# Altium PCB Avalon_ctrlunit.PcbDoc (part 1 of 6)
Units mil, origin at the board's own origin, x right, y up, seen from the top; angles counter-clockwise.
Board outline 3947.62 x 3160.22 mil, 4 copper layers (Top Layer, Mid-Layer 1, Mid-Layer 2, Bottom Layer); 194 components, 260 nets, 936 pads, 465 vias.
Unrouted connection lines stored in the file: 1.
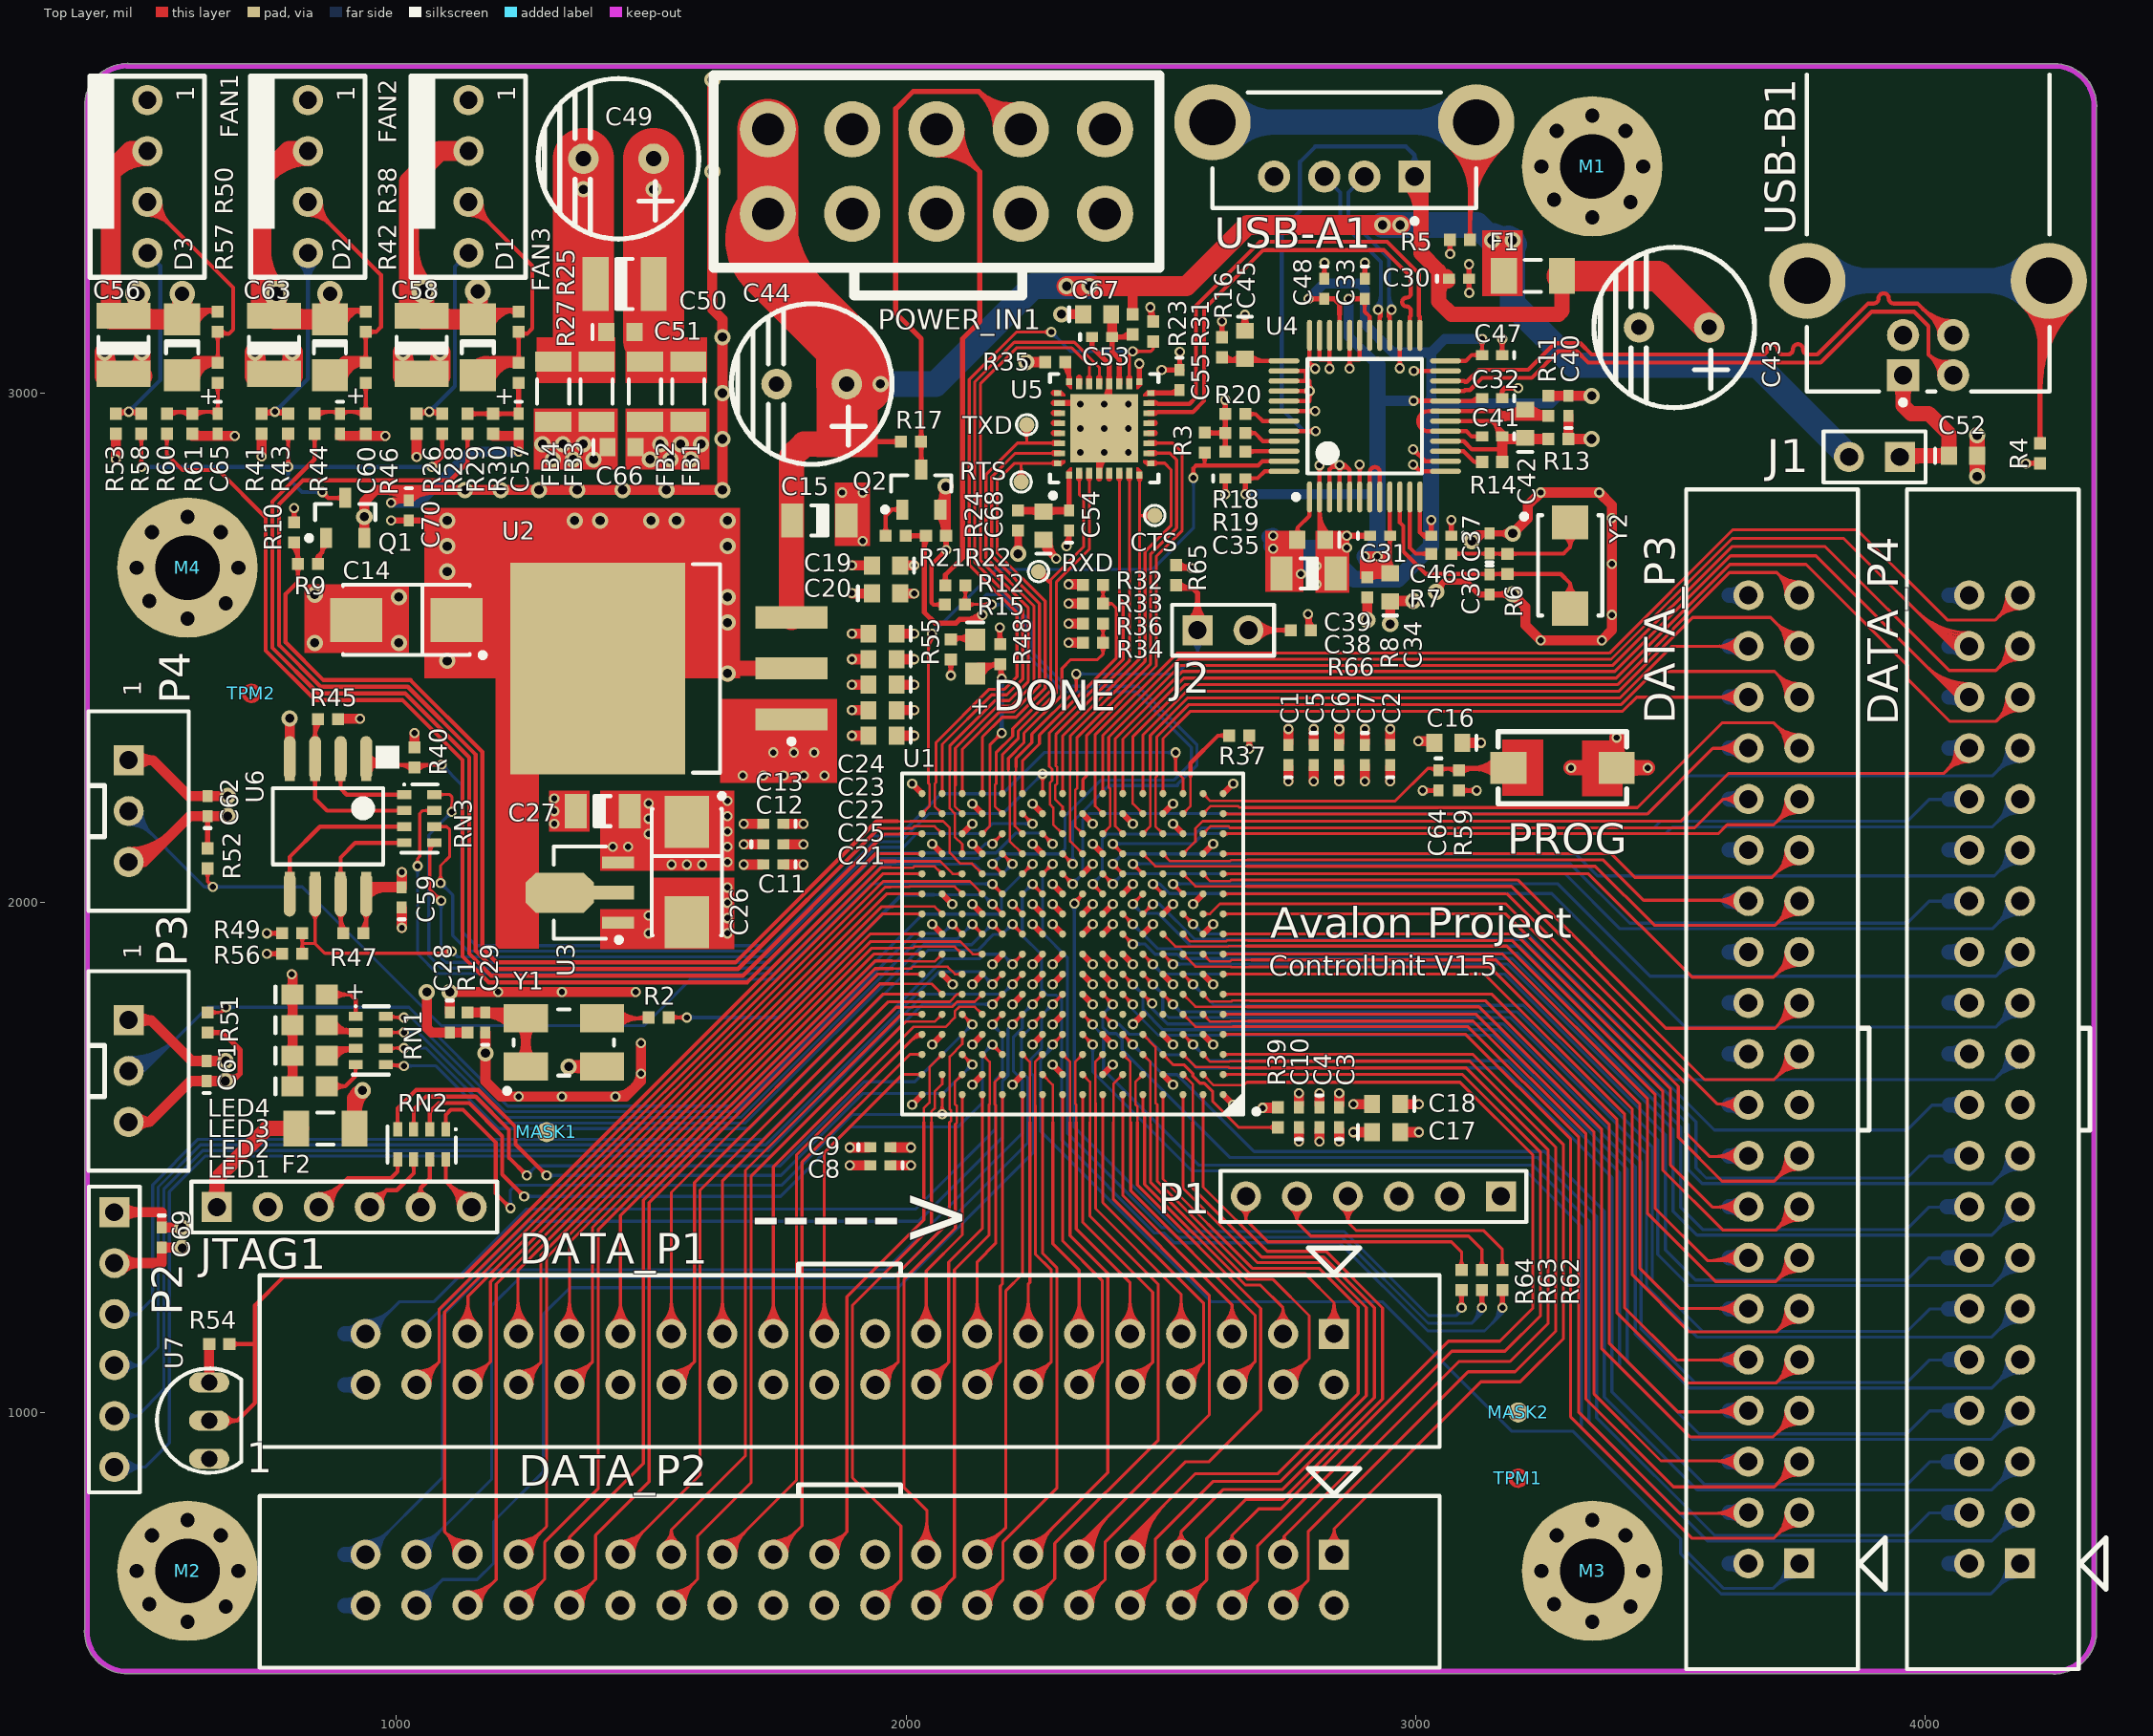
[diagram p0: Top Layer view]
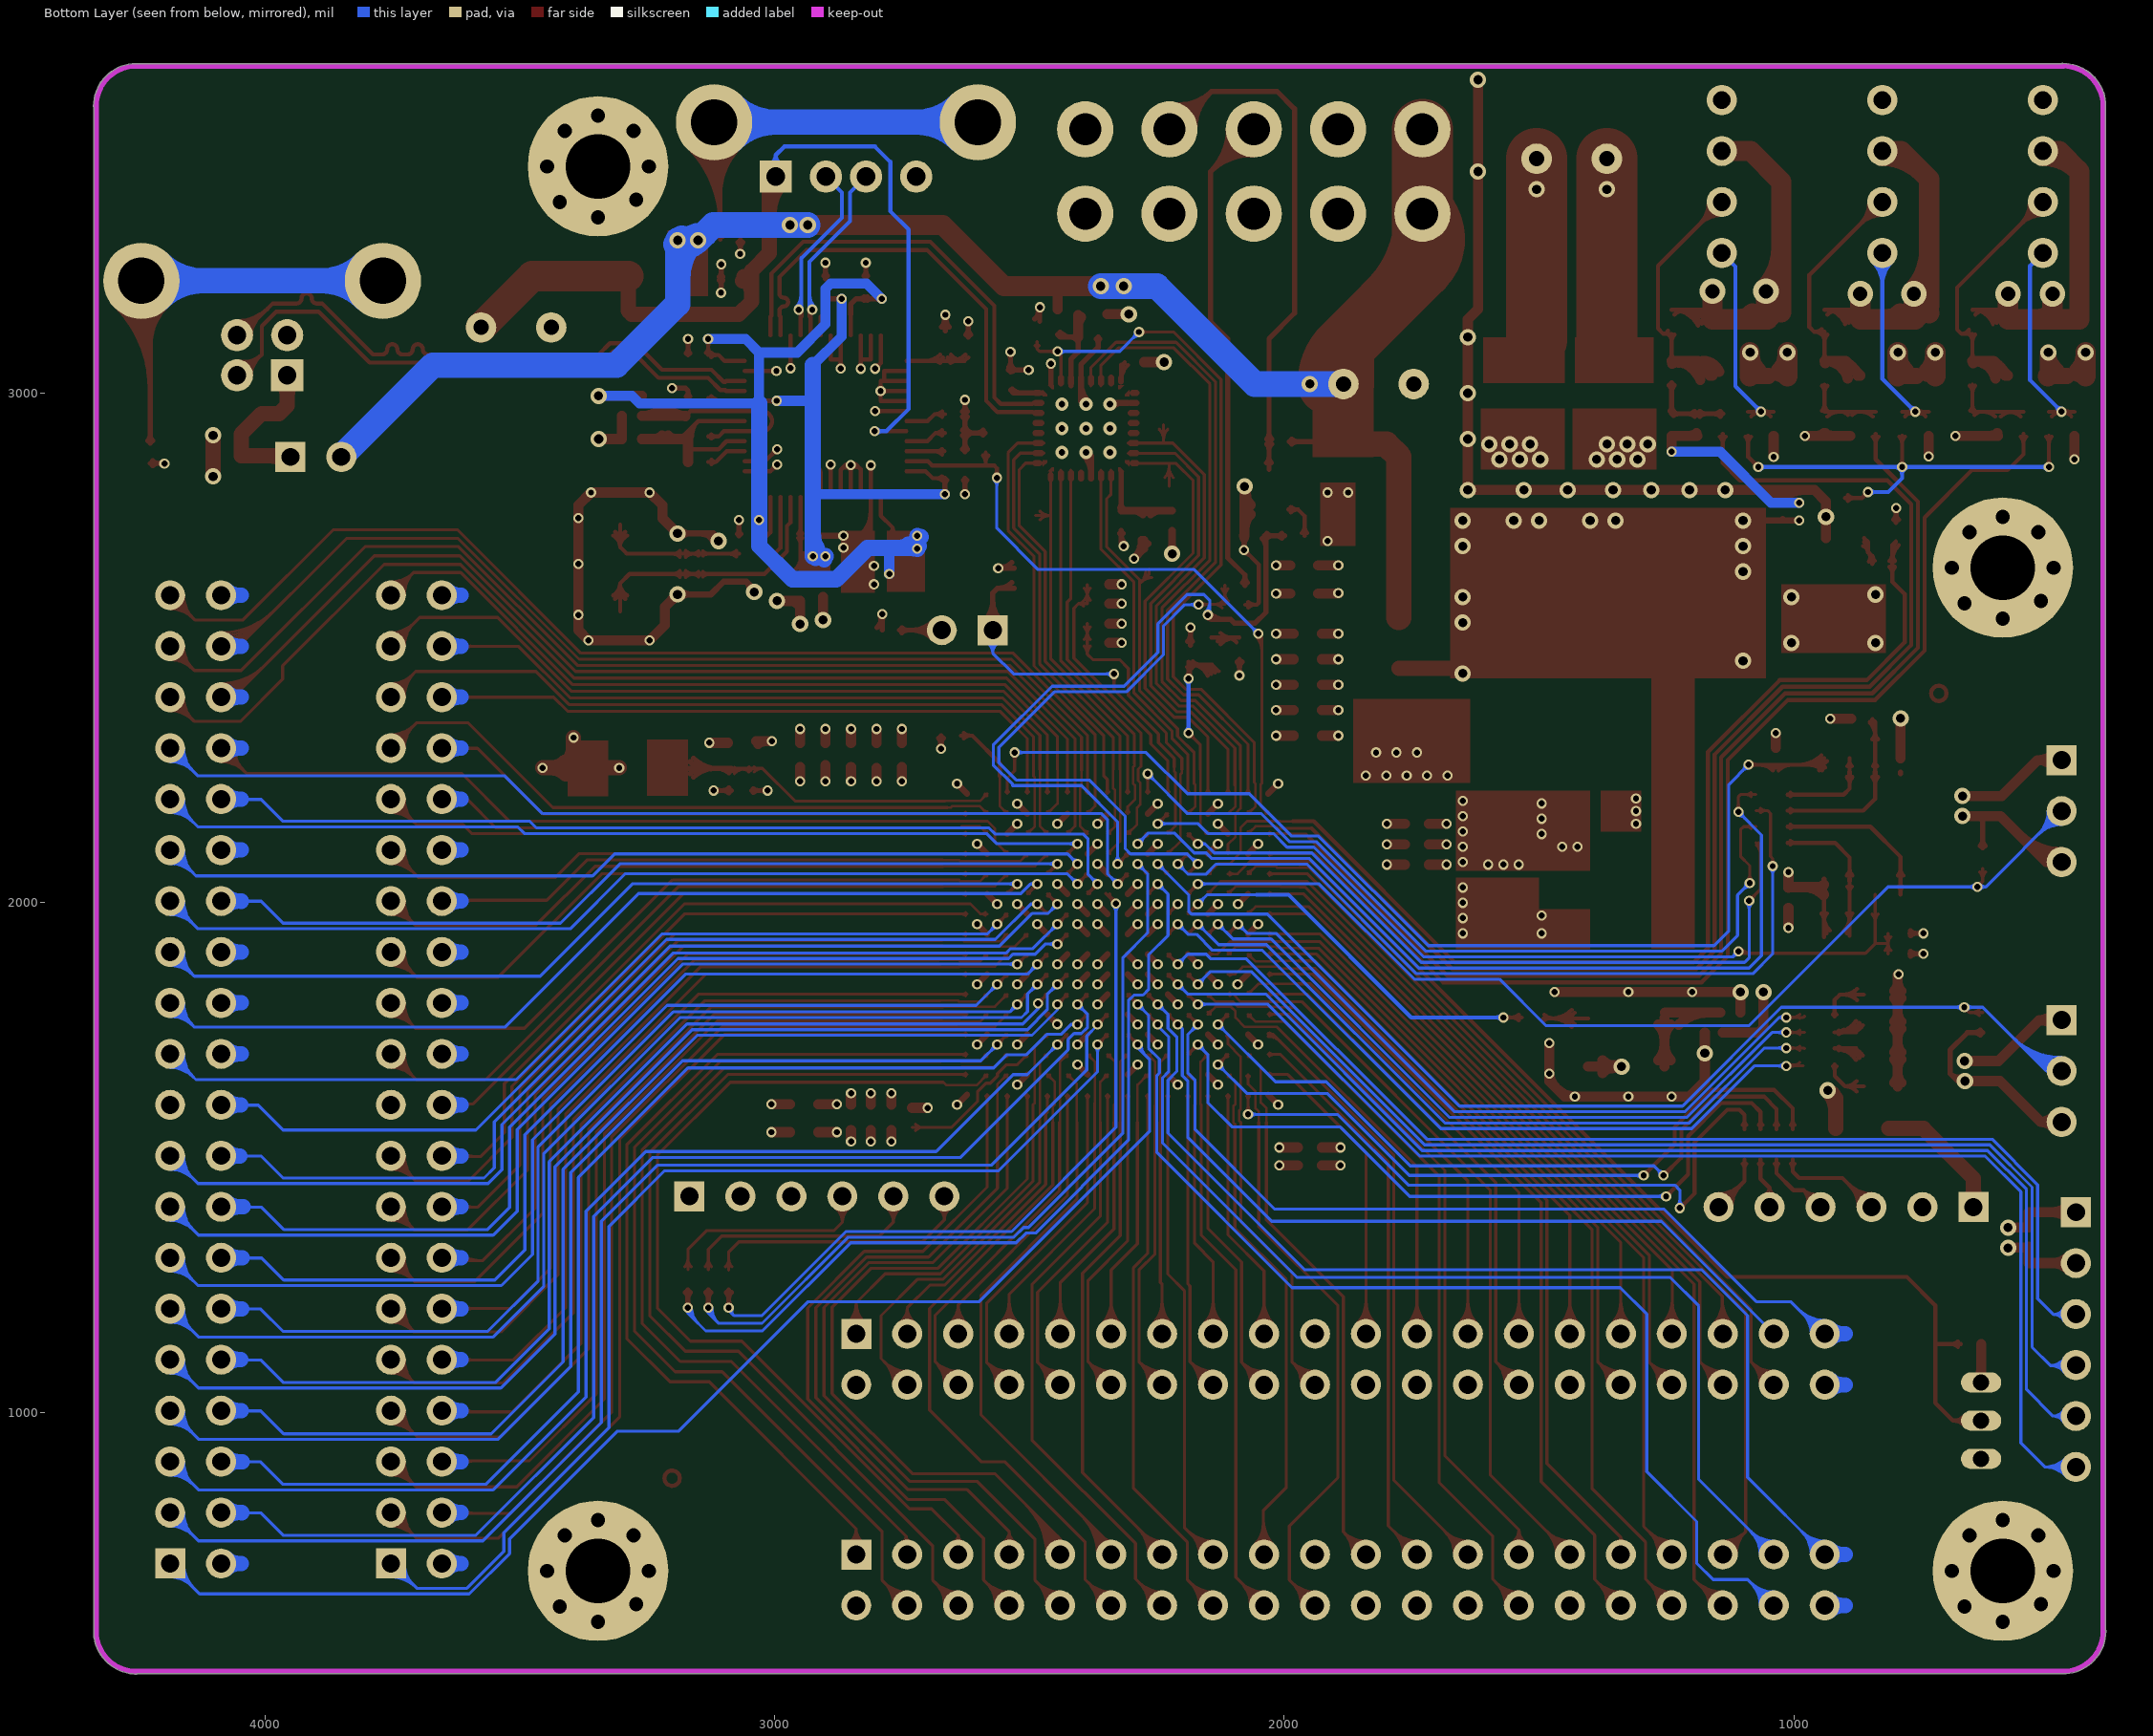
[diagram p1: Bottom Layer view, seen from below]
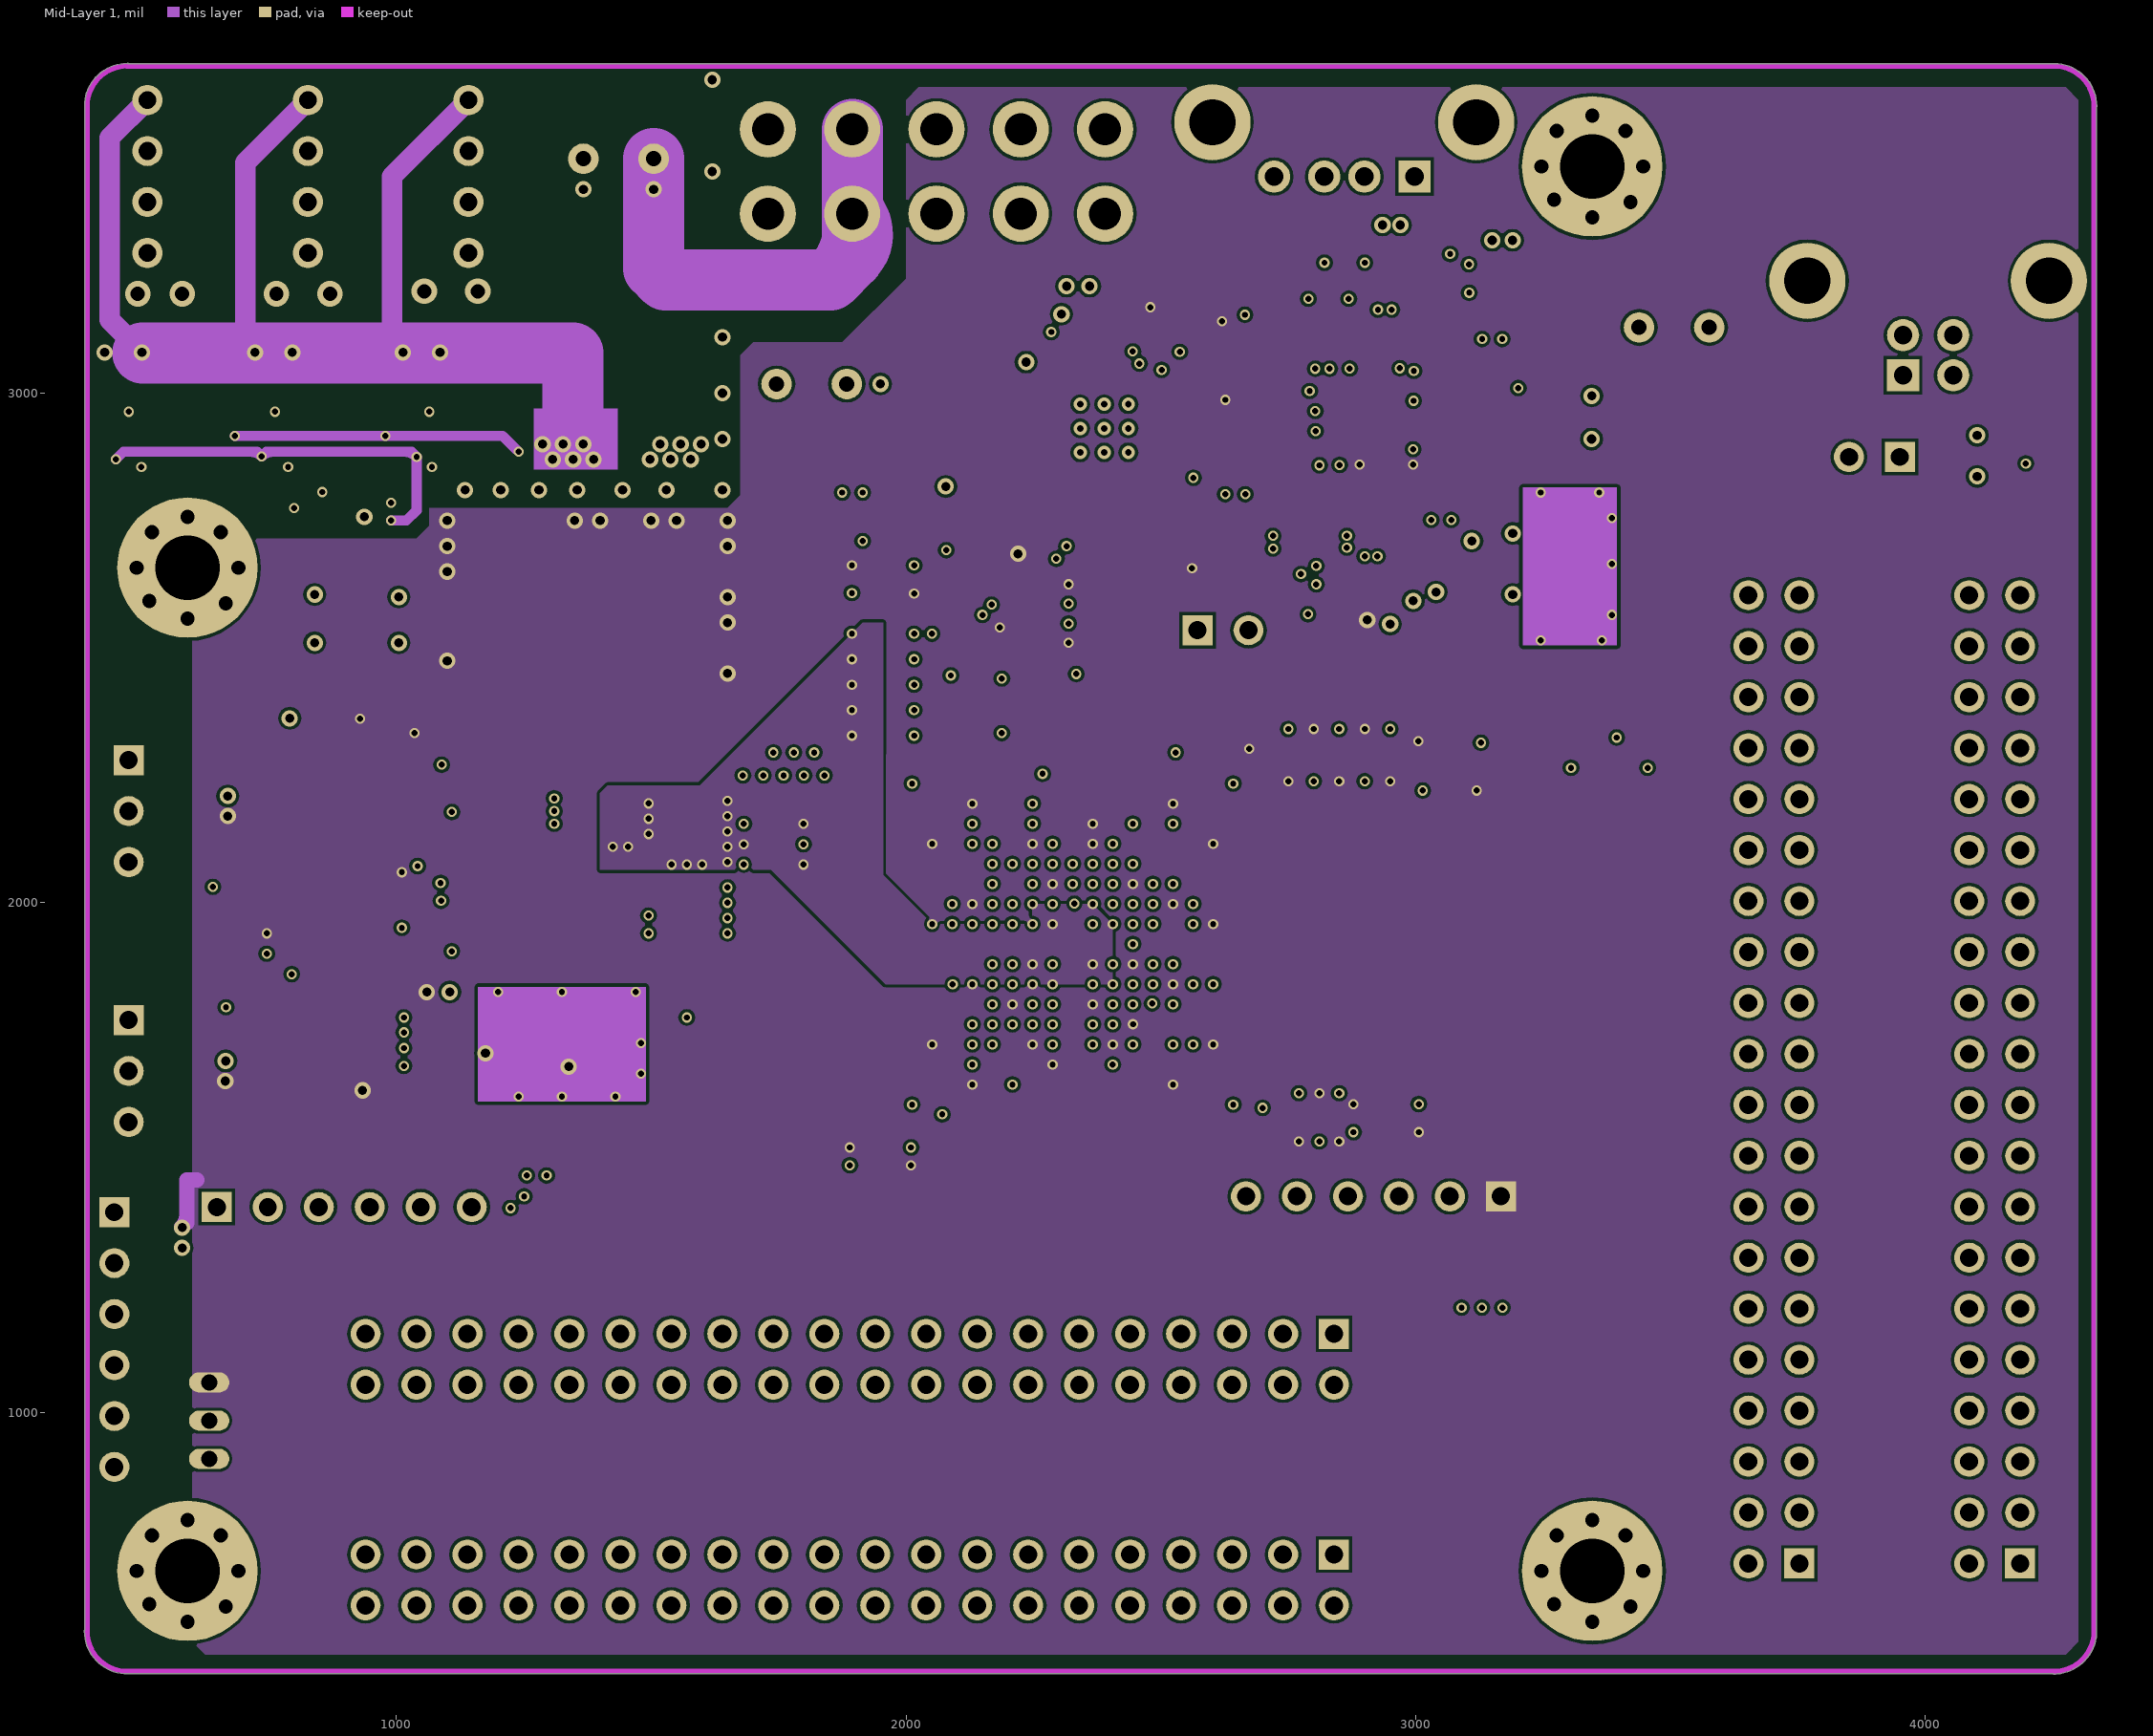
[diagram p2: Mid-Layer 1]
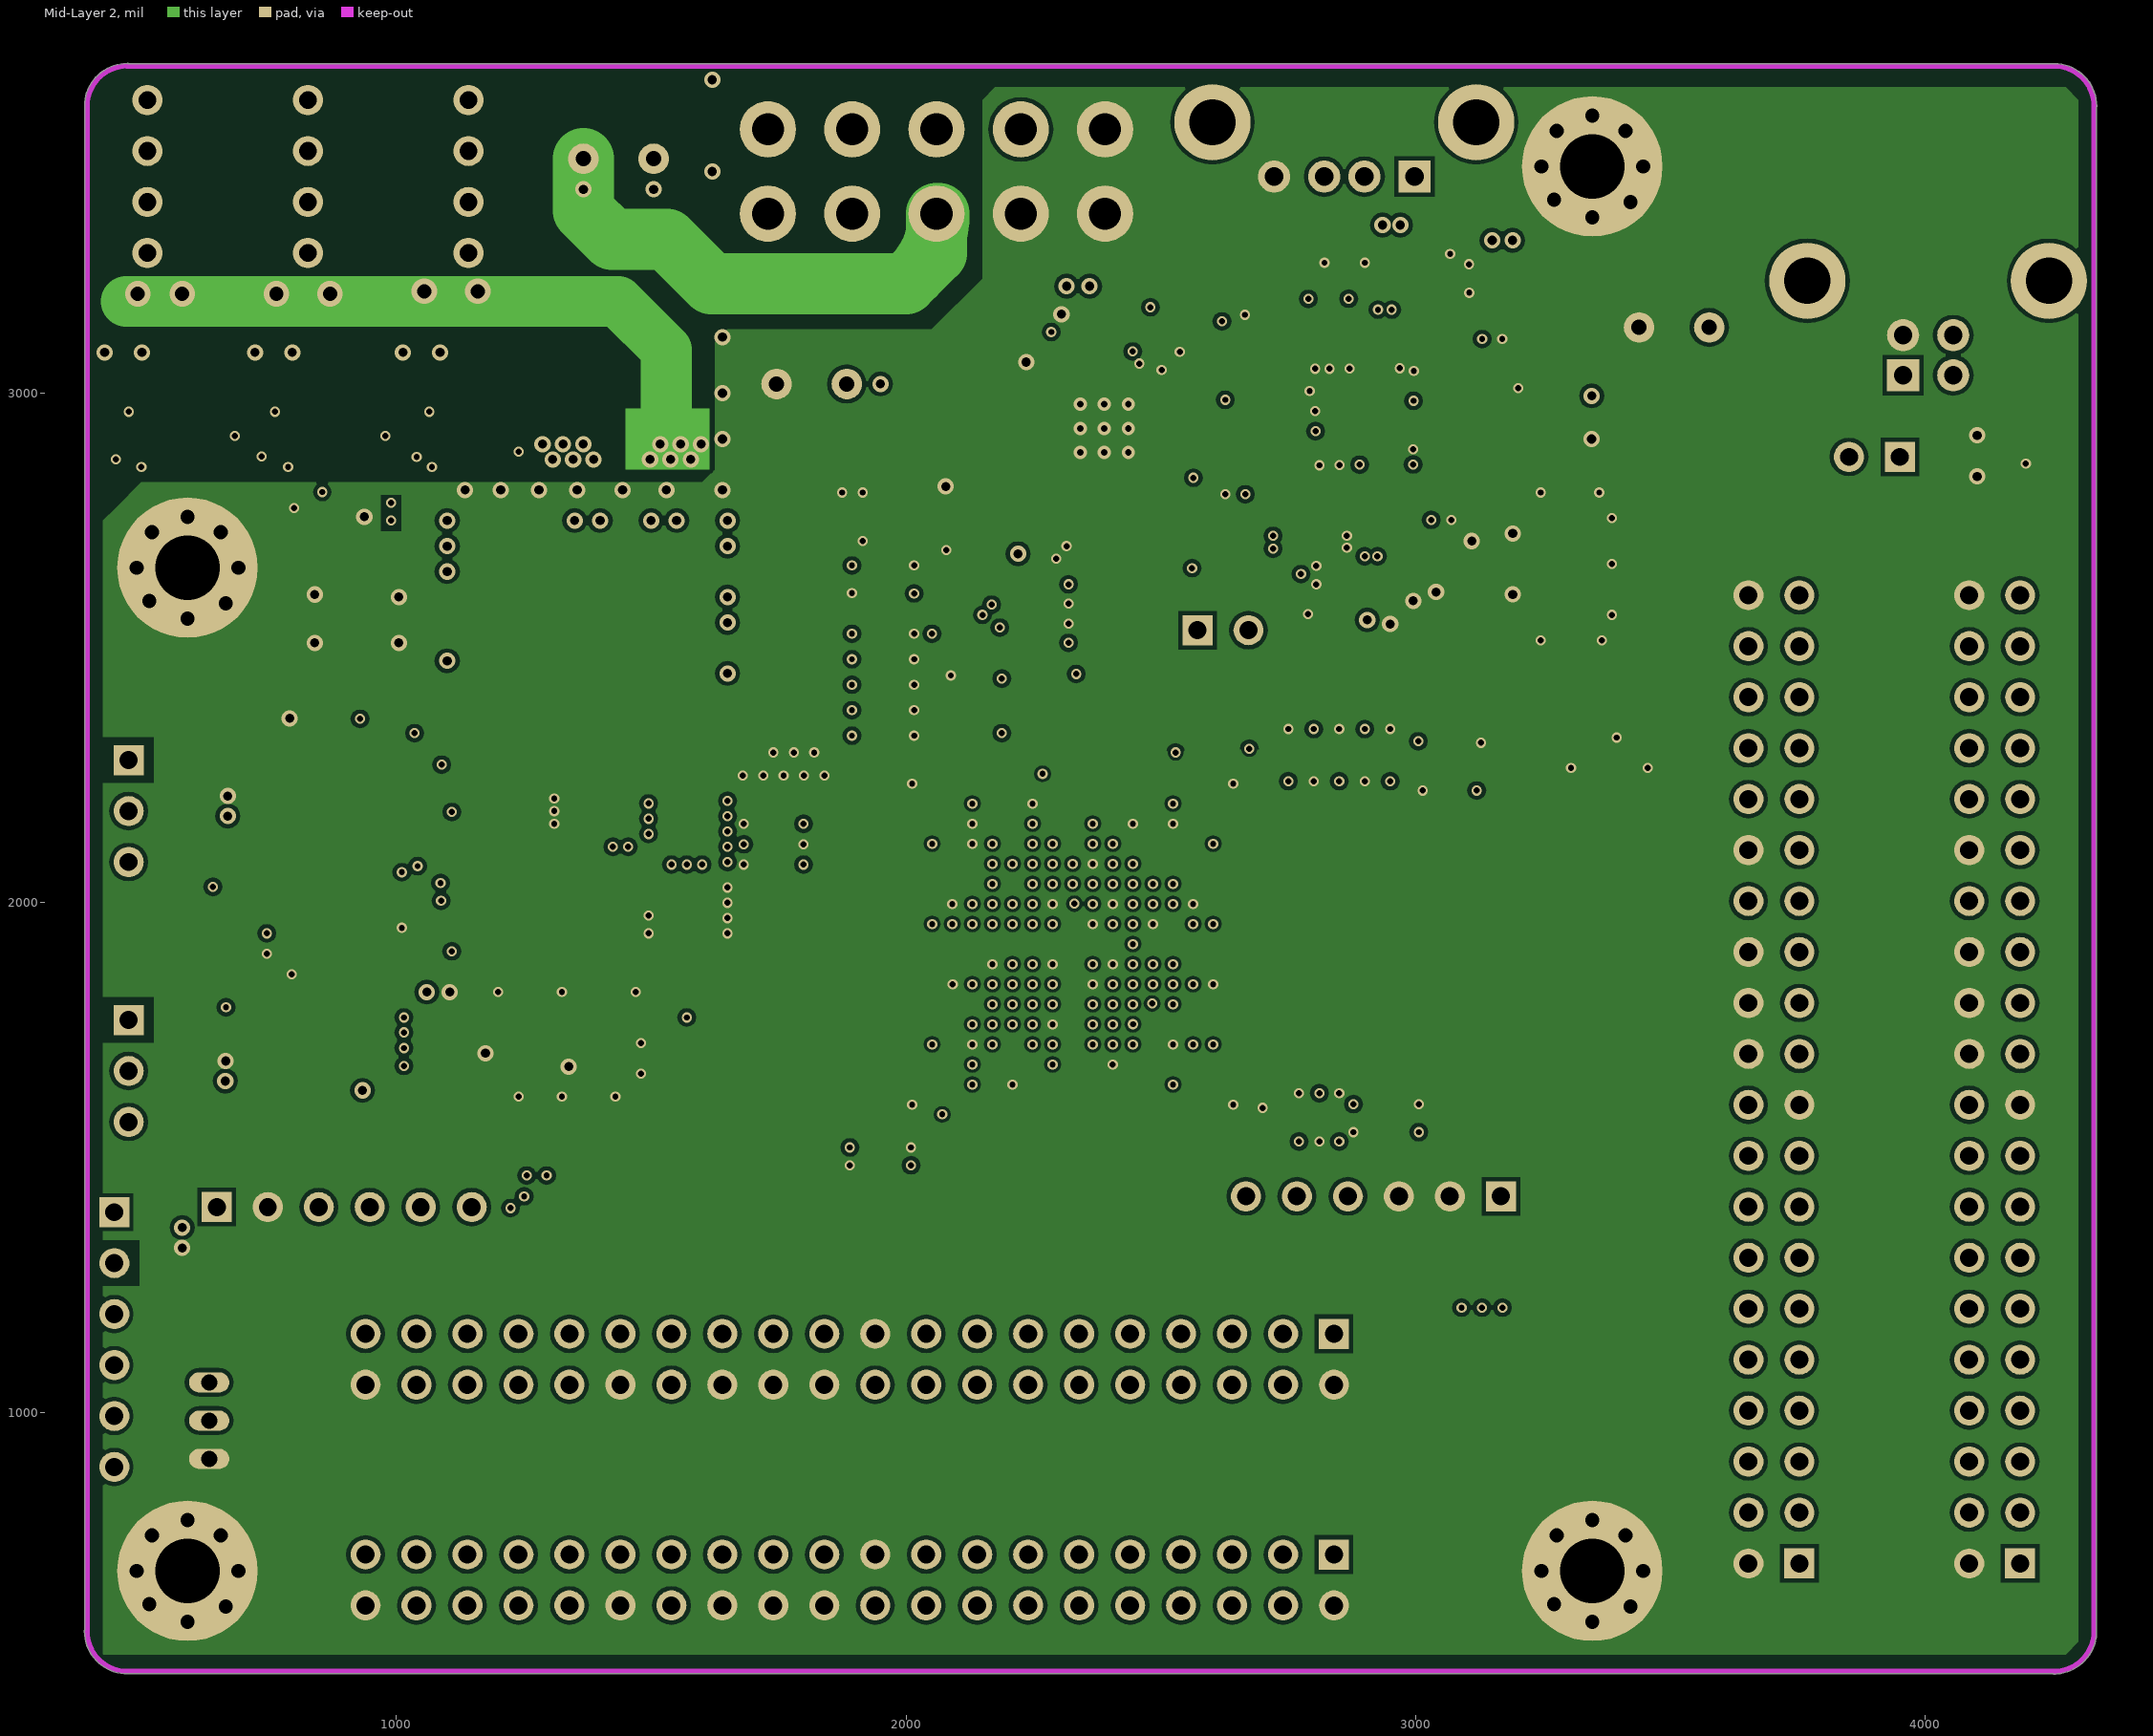
[diagram p3: Mid-Layer 2]

## Layer stack, top to bottom
Top Layer: signal copper 1.4
Dielectric: prepreg 12.6, FR-4, Dk 4.8
Mid-Layer 1: signal copper 1.4
Dielectric: core 12.6, FR-4, Dk 4.8
Mid-Layer 2: signal copper 1.4
Dielectric: prepreg 12.6, FR-4, Dk 4.8
Bottom Layer: signal copper 1.4

## Board outline
471,487.11 ccw(c472.15,570.86) 472.15,487.1 ccw(c472.15,492.12) 472.43,487.11 4250.29,487.11 ccw(c4251.98,491.83) 4251.98,486.82 ccw(c4251.98,570.57) 4258.96,487.11 4262.13,487.11 ccw(c4262.13,492.13) 4264.63,487.78 ccw(c4251.98,570.57) 4334.74,557.73 ccw(c4330.71,560.71) 4335.72,560.71 4335.72,569.42 ccw(c4251.98,570.57) 4335.73,570.57 ccw(c4330.72,570.57) 4335.72,570.86 4335.72,3561.32 ccw(c4331,3563) 4336.02,3563 ccw(c4252.26,3563) 4260.14,3646.38 ccw(c4258.27,3641.73) 4258.27,3646.75 4253.41,3646.75 ccw(c4252.26,3563) 4252.26,3646.76 ccw(c4252.26,3641.74) 4251.98,3646.75 474.12,3646.75 ccw(c472.43,3642.02) 472.43,3647.04 ccw(c472.43,3563.28) 388.68,3563.28 ccw(c393.69,3563.28) 388.69,3563 388.69,572.54 ccw(c393.41,570.86) 388.39,570.86 ccw(c472.15,570.86) 466.54,487.29 ccw(c467.87,492.13) 467.87,487.11

## Design rules (kind name [scope] priority, off if disabled: settings)
Clearance Clearance_8 [InNamedPolygon('GND1')] p1: gap=8
Clearance Clearance_7 [InNamedPolygon('GND2')] p2: gap=6
Clearance Clearance_6 [InNamedPolygon('VCC3V3')] p3: gap=8
Clearance Clearance_5 [InNamedPolygon('VCC3V31')] p4: gap=6
Clearance Clearance_4 [InNamedPolygon('VCC1V22')] p5: gap=6
Clearance Clearance_3 [OnLayer('Mid-Layer 1')] p6: gap=7
Clearance Clearance_2 [OnLayer('Mid-Layer 2')] p7: gap=7
Clearance Clearance_1 [OnLayer('Top Layer')] p8: gap=5
Clearance [OnLayer('Bottom Layer')] p9: gap=5
DiffPairsRouting DiffPair_D1DiffPairsRouting [InDifferentialPair ('D1')] p1: maxlimit=10 minlimit=8 mostfreqgap=8 maxuncoupledlength=500
DiffPairsRouting DiffPair_D2DiffPairsRouting [InDifferentialPair ('D2')] p2: maxlimit=10 minlimit=8 mostfreqgap=8 maxuncoupledlength=500
DiffPairsRouting DiffPair_USBDiffPairsRouting [InDifferentialPair ('USB')] p3: maxlimit=10 minlimit=8 mostfreqgap=8 maxuncoupledlength=500
DiffPairsRouting [All] p4: maxlimit=10 minlimit=10 mostfreqgap=10 maxuncoupledlength=500
HoleSize [All] p1: absolutevalues=TRUE maxlimit=99999 minlimit=1 maxpercent=80.000 minpercent=20.000
MatchedLengths DiffPair_D1MatchedLengths [InDifferentialPair ('D1')] p1: tolerance=10 checknetsindiffpair=TRUE checkdiffpairvsdiffpair=TRUE checkothers=TRUE
MatchedLengths DiffPair_D2MatchedLengths [InDifferentialPair ('D2')] p2: tolerance=10 checknetsindiffpair=TRUE checkdiffpairvsdiffpair=TRUE checkothers=TRUE
MatchedLengths DiffPair_USBMatchedLengths [InDifferentialPair ('USB')] p3: tolerance=10 checknetsindiffpair=TRUE checkdiffpairvsdiffpair=TRUE checkothers=TRUE
MinimumSolderMaskSliver [All] p1 off: minsoldermaskwidth=10
PlaneClearance [All] p1: clearance=12
PlaneConnect [All] p1: planeconnectstyle=Direct reliefexpansion=20 reliefentries=4 reliefconductorwidth=10 reliefairgap=10
PolygonConnect PolygonConnect_20 [All vs IsNamedPolygon('GND1')] p1: connectstyle=Direct reliefconductorwidth=10 reliefentries=4 polygonreliefangle="90 Angle" airgapwidth=10
PolygonConnect PolygonConnect_19 [All vs IsNamedPolygon('GND2')] p2: connectstyle=Direct reliefconductorwidth=10 reliefentries=4 polygonreliefangle="90 Angle" airgapwidth=10
PolygonConnect PolygonConnect_18 [All vs IsNamedPolygon('VCC3V31')] p3: connectstyle=Direct reliefconductorwidth=10 reliefentries=4 polygonreliefangle="90 Angle" airgapwidth=10
PolygonConnect PolygonConnect_17 [All vs IsNamedPolygon('VCC3V3')] p4: connectstyle=Direct reliefconductorwidth=10 reliefentries=4 polygonreliefangle="90 Angle" airgapwidth=10
PolygonConnect PolygonConnect_16 [All vs IsNamedPolygon('VCC1V22')] p5: connectstyle=Direct reliefconductorwidth=10 reliefentries=4 polygonreliefangle="90 Angle" airgapwidth=10
PolygonConnect PolygonConnect_15 [All vs IsNamedPolygon('VCC1V23')] p6: connectstyle=Direct reliefconductorwidth=10 reliefentries=4 polygonreliefangle="90 Angle" airgapwidth=10
PolygonConnect PolygonConnect_14 [All vs IsNamedPolygon('VCC1V2')] p7: connectstyle=Direct reliefconductorwidth=10 reliefentries=4 polygonreliefangle="90 Angle" airgapwidth=10
PolygonConnect PolygonConnect_13 [All vs IsNamedPolygon('VCC1V23')] p8: connectstyle=Direct reliefconductorwidth=10 reliefentries=4 polygonreliefangle="90 Angle" airgapwidth=10
PolygonConnect PolygonConnect_12 [All vs IsNamedPolygon('GND3')] p9: connectstyle=Direct reliefconductorwidth=10 reliefentries=4 polygonreliefangle="90 Angle" airgapwidth=10
PolygonConnect PolygonConnect_11 [All vs IsNamedPolygon('VCC3V3')] p10: connectstyle=Direct reliefconductorwidth=10 reliefentries=4 polygonreliefangle="90 Angle" airgapwidth=10
PolygonConnect PolygonConnect_10 [All vs IsNamedPolygon('VCC1V23')] p11: connectstyle=Direct reliefconductorwidth=10 reliefentries=4 polygonreliefangle="90 Angle" airgapwidth=10
PolygonConnect PolygonConnect_9 [All vs IsNamedPolygon('VCC1V23')] p12: connectstyle=Direct reliefconductorwidth=10 reliefentries=4 polygonreliefangle="90 Angle" airgapwidth=10
PolygonConnect PolygonConnect_8 [All vs IsNamedPolygon('VCC1V22')] p13: connectstyle=Direct reliefconductorwidth=10 reliefentries=4 polygonreliefangle="90 Angle" airgapwidth=10
PolygonConnect PolygonConnect_7 [All vs IsNamedPolygon('VCC1V2')] p14: connectstyle=Direct reliefconductorwidth=10 reliefentries=4 polygonreliefangle="90 Angle" airgapwidth=10
PolygonConnect PolygonConnect_6 [All vs IsNamedPolygon('VFAN12')] p15: connectstyle=Direct reliefconductorwidth=10 reliefentries=4 polygonreliefangle="90 Angle" airgapwidth=10
PolygonConnect PolygonConnect_5 [All vs IsNamedPolygon('VFAN12')] p16: connectstyle=Direct reliefconductorwidth=10 reliefentries=4 polygonreliefangle="90 Angle" airgapwidth=10
PolygonConnect PolygonConnect_4 [All vs IsNamedPolygon('VFAN12')] p17: connectstyle=Relief reliefconductorwidth=10 reliefentries=4 polygonreliefangle="90 Angle" airgapwidth=10
PolygonConnect PolygonConnect_3 [All vs IsNamedPolygon('VCC1V23')] p18: connectstyle=Direct reliefconductorwidth=10 reliefentries=4 polygonreliefangle="90 Angle" airgapwidth=10
PolygonConnect PolygonConnect_2 [All vs IsNamedPolygon('VCC1V22')] p19: connectstyle=Direct reliefconductorwidth=10 reliefentries=4 polygonreliefangle="90 Angle" airgapwidth=10
PolygonConnect PolygonConnect_1 [All vs IsNamedPolygon('VCC1V2')] p20: connectstyle=Direct reliefconductorwidth=10 reliefentries=4 polygonreliefangle="90 Angle" airgapwidth=10
PolygonConnect [All] p21: connectstyle=Direct reliefconductorwidth=10 reliefentries=4 polygonreliefangle="90 Angle" airgapwidth=10
RoutingVias [All] p1: holewidth=28 width=50 viastyle="Through Hole" minholewidth=12 minwidth=20 maxholewidth=2000 maxwidth=3000
SilkToSilkClearance [All] p1 off: silktosilkclearance=10
SilkscreenOverComponentPads [All] p1: minsilkscreentomaskgap=2
SolderMaskExpansion [All] p1: expansion=4
Width DiffPair_D1Width [InDifferentialPair('D1')] p1: maxlimit=1000 minlimit=8 preferedwidth=8 minimp=50.000000 maximp=50.000000 favimp=50.000000
Width DiffPair_D2Width [InDifferentialPair('D2')] p2: maxlimit=8 minlimit=8 preferedwidth=8
Width DiffPair_USBWidth [InDifferentialPair('USB')] p3: maxlimit=8 minlimit=8 preferedwidth=8
Width [All] p4: maxlimit=4111 minlimit=4 preferedwidth=10 midlayer1_minwidth=6 midlayer2_minwidth=6 minimp=50.000000 maximp=50.000000 favimp=50.000000
21 further rules are at their usual default settings.

## Classes and differential pairs
differential pair D2: +D2_P -D2_N
differential pair D1: +D1_P -D1_N
differential pair USB: +USB_P -USB_N

## Components (designator, comment, footprint, x,y, rotation, side; value= is the part's Value field where it differs from the comment)
C1 "0.47uF" CAPC1005L 2750,2290 r90 top
C2 "0.47uF" CAPC1005L 2950,2290 r90 top
C3 "0.47uF" CAPC1005L 2850,1579 r90 top
C4 "0.47uF" CAPC1005L 2811,1579 r270 top
C5 "0.47uF" CAPC1005L 2800,2290 r270 top
C6 "0.47uF" CAPC1005L 2850,2290 r90 top
C7 "0.47uF" CAPC1005L 2900,2290 r270 top
C8 "0.47uF" CAPC1005L 1950,1485 r180 top
C9 "0.47uF" CAPC1005L 1950,1520 r0 top
C10 "0.47uF" CAPC1005L 2771,1579 r90 top
C11 "0.47uF" CAPC1005L 1740,2075 r180 top
C12 "0.47uF" CAPC1005L 1740,2115 r0 top
C13 "0.47uF" CAPC1005L 1740,2155 r180 top
C14 "100uF/6.3V" C 1020,2555 r180 top
C15 "22uF" CAPC3216L 1830,2750 r180 top
C16 "4.7uF" CAPC1608L 3064,2314 r180 top
C17 "4.7uF" CAPC1608L 2942,1550 r0 top
C18 "4.7uF" CAPC1608L 2942,1605 r180 top
C19 "4.7uF" CAPC1608L 1961,2662 r180 top
C20 "4.7uF" CAPC1608L 1961,2607 r0 top
C21 "4.7uF" CAPC1608L 1954,2328 r180 top
C22 "4.7uF" CAPC1608L 1954,2428 r180 top
C23 "4.7uF" CAPC1608L 1954,2478 r180 top
C24 "4.7uF" CAPC1608L 1954,2528 r180 top
C25 "4.7uF" CAPC1608L 1954,2378 r180 top
C26 "100uF/6.3V" C 1570,2060 r270 top
C27 "22uF" CAPC3216L 1405,2180 r0 top
C28 "0.47uF" CAPC1005L 1105,1765 r270 top
C29 "0.47uF" CAPC1005L 1175,1765 r90 top
C30 "0.47uF" CAPC1005L 3085,3225 r0 top
C31 "0.47uF" CAPC1005L 2930,2720 r0 top
C32 "0.47uF" CAPC1005L 3150,2990 r180 top
C33 "0.47uF" CAPC1005L 2900,3205 r270 top
C34 "4.7uF" CAPC1608L 2950,2619 r90 top
C35 "0.47uF" CAPC1005L 2646,2833 r0 top
C36 "22pF" CAPC1005L 3145,2625 r270 top
C37 "22pF" CAPC1005L 3145,2705 r90 top
C38 "22uF" CAPC3216L 2790,2646 r180 top
C39 "4.7uF" CAPC1608L 2795,2712 r180 top
C40 "0.47uF" CAPC1005L 3300,2975 r90 top
C41 "0.47uF" CAPC1005L 3150,2915 r180 top
C42 "4.7uF" CAPC1608L 3215,2940 r90 top
C43 "470uF/6.3V" CAP8X8 3436,3129 r270 top
C44 "470uF/6.3V" CAP8X8 1744,3018 r270 top
C45 "4.7uF" CAPC1608L 2665,3095 r270 top
C46 "0.47uF" CAPC1005L 3050,2720 r180 top
C47 "0.47uF" CAPC1005L 3150,3075 r180 top
C48 "0.47uF" CAPC1005L 2821,3205 r270 top
C49 "270uF/16V" CAP8X8 1365,3460 r270 top
C50 "22uF" CAPC3225N 1448,3214 r0 top
C51 "4.7uF" CAPC1608L 1440,3120 r0 top
C52 "4.7uF" CAPC1608L 4074,2877 r0 top
C53 "0.47uF" CAPC1005L 2385,3110 r0 top
C54 "0.47uF" CAPC1005L 2320,2750 r90 top
C55 "0.47uF" CAPC1005L 2537,3026 r270 top
C56 "22uF" CAPC3225N 465,3095 r90 top
C57 "22pF" CAPC1005L 1240,2940 r270 top
C58 "22uF" CAPC3225N 1050,3095 r90 top
C59 "0.47uF" CAPC1005L 1011,2011 r90 top
C60 "22pF" CAPC1005L 890,2940 r270 top
C61 "0.47uF" CAPC1005L 628,1670 r90 top
C62 "0.47uF" CAPC1005L 630,2190 r90 top
C63 "22uF" CAPC3225N 760,3095 r90 top
C64 "0.47uF" CAPC1005L 3045,2240 r270 top
C65 "22pF" CAPC1005L 650,2940 r270 top
C66 "4.7uF" CAPC1608L 1442,2894 r0 top
C67 "4.7uF" CAPC1608L 2375,3155 r0 top
C68 "4.7uF" CAPC1608L 2270,2740 r90 top
C69 "0.47uF" CAPC1005L 540,1343 r270 top
C70 "0.47uF" CAPC1005L 1025,2770 r270 top
CTS "TP" TP 2488,2760 r90 top
D1 "Diode 1N4148" CD3216-1206 1160,3090 r90 top
D2 "Diode 1N4148" CD3216-1206 870,3090 r90 top
D3 "Diode 1N4148" CD3216-1206 580,3090 r90 top
DATA_P1 "Header 20X2" IDE40 1889.76,1102.36 r0 top locked
DATA_P2 "Header 20X2" IDE40 1889.76,669.29 r0 top
DATA_P3 "Header 20X2" IDE40 3700.79,1653.54 r270 top locked
DATA_P4 "Header 20X2" IDE40 4133.86,1653.54 r270 top locked
DONE "GREEN" CD1608-0603 2136,2483 r90 top
F1 "Fuse 2" RESC3216N 3230,3230 r0 top
F2 "Fuse 2" RESC3216N 861,1557 r0 top
FAN1 "Header 4" 4PINFAN 511.81,3425.2 r90 top locked
FAN2 "Header 4" 4PINFAN 826.77,3425.2 r90 top locked
FAN3 "Header 4" 4PINFAN 1141.73,3425.2 r90 top locked
FB1 "MB" INDC3216L 1573,3003 r90 top
FB2 "MB" INDC3216L 1488,3003 r90 top
FB3 "MB" INDC3216L 1393,3003 r90 top
FB4 "MB" INDC3216L 1308,3003 r90 top
J1 "Header 2" HDR1X2 3950,2875 r180 top
J2 "Header 2" HDR1X2 2572,2535 r0 top
JTAG1 "Header 6" HDR1X6 648,1403 r0 top
LED1 "GREEN" CD1608-0603 830,1640 r180 top
LED2 "GREEN" CD1608-0603 830,1700 r180 top
LED3 "GREEN" CD1608-0603 830,1760 r180 top
LED4 "GREEN" CD1608-0603 830,1820 r180 top
M1 "Mount Hole" MHOLE2 3346.46,3444.88 r0 top
M2 "Mount Hole" MHOLE2 590.55,688.98 r0 top
M3 "Mount Hole" MHOLE2 3346.46,688.98 r0 top
M4 "Mount Hole" MHOLE2 590.55,2657.48 r0 top
MASK1 "Socket" MASK_LT 1295,1550 r90 top
MASK2 "Socket" MASK_LT 3201,1000 r90 top
P1 "Header 6" HDR1X6 3167,1424 r180 top locked
P2 "Header 6" HDR1X6 447,1393 r270 top
P3 "TEMP2" 3PIN 475,1670 r270 top
P4 "TEMP3" 3PIN 475,2180 r270 top
POWER_IN1 "Header 5X2A" PWR_10PIN 2060,3435 r0 top
PROG "SW-PB" SKQMA 3288,2265 r180 top
Q1 "MMBT3904" SOT23_L 900,2755 r90 top
Q2 "MMBT3904" SOT23_L 2030,2811 r90 top
R1 "MB" RESC1005L 1140,1765 r270 top
R2 "0R" RESC1005L 1515,1775 r180 top
R3 "10K" RESC1005L 2586,2903 r270 top
R4 "MB" RESC1005L 4225,2882 r270 top
R5 "MB" RESC1005L 3087,3301 r180 top
R6 "1M" RESC1005L 3180,2665 r90 top
R7 "0R" RESC1005L 3050,2685 r0 top
R8 "MB" RESC1005L 2905,2619 r270 top
R9 "1K" RESC1005L 827,2665 r0 top
R10 "270R" RESC1005L 800,2727 r270 top
R11 "MB" RESC1005L 3260,2975 r90 top
R12 "4.7K" RESC1005L 2097,2623 r180 top
R13 "MB" RESC1005L 3280,2910 r0 top
R14 "2.43K" RESC1005L 3150,2865 r0 top
R15 "10K" RESC1005L 2096,2585 r180 top
R16 "10K" RESC1005L 2620,3090 r270 top
R17 "4.7K" RESC1005L 2010,2905 r180 top
R18 "510R" RESC1005L 2646,2922 r180 top
R19 "10K" RESC1005L 2646,2885 r180 top
R20 "510R" RESC1005L 2646,2959 r180 top
R21 "1K" RESC1005L 1980,2720 r180 top
R22 "270R" RESC1005L 2059,2720 r180 top
R23 "MB" RESC1005L 2445,3135 r270 top
R24 "MB" RESC1005L 2220,2750 r90 top
R25 "4.7K" RESC1005L 1240,3140 r270 top
R26 "4.7K" RESC1005L 1040,2940 r270 top
R27 "10K" RESC1005L 1240,3040 r270 top
R28 "100R" RESC1005L 1090,2940 r270 top
R29 "100R" RESC1005L 1140,2940 r90 top
R30 "4.7K" RESC1005L 1190,2940 r270 top
R31 "10K" RESC1005L 2485,3121 r90 top
R32 "4.7K" RESC1005L 2367,2624 r0 top
R33 "NC" RESC1005L 2367,2587 r0 top
R34 "NC" RESC1005L 2367,2510 r0 top
R35 "MB" RESC1005L 2293,3061 r0 top
R36 "100R" RESC1005L 2367,2548 r0 top
R37 "4.7K" RESC1005L 2654,2328 r180 top
R38 "4.7K" RESC1005L 940,3140 r270 top
R39 "4.7K" RESC1005L 2730,1579 r270 top
R40 "4.7K" RESC1005L 1036,2285 r270 top
R41 "4.7K" RESC1005L 736,2940 r270 top
R42 "10K" RESC1005L 940,3040 r270 top
R43 "100R" RESC1005L 788,2940 r270 top
R44 "100R" RESC1005L 840,2940 r90 top
R45 "1.8K" RESC1005L 866,2360 r180 top
R46 "4.7K" RESC1005L 940,2940 r270 top
R47 "1.8K" RESC1005L 916,1940 r180 top
R48 "510R" RESC1005L 2185,2488 r270 top
R49 "100R" RESC1005L 796,1940 r0 top
R50 "4.7K" RESC1005L 650,3140 r270 top
R51 "4.7K" RESC1005L 630,1765 r90 top
R52 "4.7K" RESC1005L 630,2087 r270 top
R53 "4.7K" RESC1005L 450,2940 r270 top
R54 "4.7K" RESC1005L 653,1134 r0 top
R55 "270R" RESC1005L 2088,2497 r270 top
R56 "100R" RESC1005L 796,1900 r180 top
R57 "10K" RESC1005L 650,3040 r270 top
R58 "100R" RESC1005L 500,2940 r270 top
R59 "4.7K" RESC1005L 3085,2240 r90 top
R60 "100R" RESC1005L 550,2940 r90 top
R61 "4.7K" RESC1005L 600,2940 r270 top
R62 "270R" RESC1005L 3170,1260 r270 top
R63 "270R" RESC1005L 3130,1260 r270 top
R64 "270R" RESC1005L 3090,1260 r270 top
R65 "4.7K" RESC1005L 2530,2643 r90 top
R66 "270R" RESC1005L 2775,2535 r0 top
RN1 "330R" EXBV8V 950,1730 r270 top
RN2 "100R" EXBV8V 1050,1526 r180 top
RN3 "100R" EXBV8V 1045.25,2165.25 r270 top
RTS "TP" TP 2226,2825.79 r90 top
RXD "TP" TP 2260,2650 r90 top
TPM1 "MASKTEST" MASKTEST 3201,871 r90 top
TPM2 "MASKTEST" MASKTEST 716,2411 r90 top
TXD "TP" TP 2237,2938 r90 top
U1 "XC6SLX16-2FTG256C" FTG256_L 2327,1919 r180 top locked
U2 "LM1086CS-3.3" TS3B_M 1535,2460 r180 top
U3 "RT9166A_CXL" SOT-89_M 1360,2020 r180 top
U4 "μPD720114" TQFP48_L 2900,2955 r90 top
U5 "FT232RQ-Tray" PQFN5X5-32_V_M 2389,2931.02 r0 top locked
U6 "W25Q80BV" WSOP8 866,2150 r180 top
U7 "DS18B20" TO-92_M 633,984 r0 top
USB-A1 "1364428-1" 1364428 2860,3590 r90 top locked
USB-B1 "1470156-1" 1470156 4005.38,3626.05 r90 top locked
Y1 "2SMX" SMX2 1330,1725 r0 top
Y2 "XTAL" 4SMX 3303,2662 r270 top

## Footprints (in the part's own frame and the unit in brackets; to place one, negate y for a bottom-side part, rotate by r counter-clockwise, add the part's x,y. Pads: shape width x height; smd on the part's side, far side on the other; paste and mask are expansions set on the pad)
3PIN [mm]
  rect 1.5x1.5 hole 0.9: 1(-2.54,0)
  round 1.5 hole 0.9: 2(0,0) 3(2.54,0)
  silkscreen extent -4.97,-2 4.97,3
4PINFAN [mm]
  round 1.5 hole 0.9 paste+0.05 mask+0.05: 1(3.81,0) 2(1.27,0) 3(-1.27,0) 4(-3.81,0)
  silkscreen extent -5.03,-2.85 5,2.85
4SMX [mm] "Quartz Crystal, SM; Body 5.2 x 3.4 mm (LxW max)"
  rect 1.7x1.8 smd: 1(-2.15,0) 2(2.15,0)
  silkscreen extent -2.57,-2.42 2.5,1.6
1364428 [mm] "Connector; USB1.1, Type A, Thru-Hole; 4 Position; Vertical"
  rect 1.6x1.6 hole 0.92: 1(-4.19,-3.5)
  round 1.6 hole 0.92: 2(-4.19,-1) 3(-4.19,1) 4(-4.19,3.5)
  round 3.8 hole 2.3: 5(-1.48,6.57) 6(-1.48,-6.57)
  silkscreen extent -6.53,-6.57 0,6.57
1470156 [mm] "Connector; USB1.1, Type B, Thru-Hole; 4 Position; Right Angle"
  rect 1.6x1.6 hole 0.92: 1(-15.01,1.25)
  round 1.6 hole 0.92: 2(-15.01,-1.25) 3(-13.01,-1.25) 4(-13.01,1.25)
  round 3.8 hole 2.3: 5(-10.3,6.02) 6(-10.3,-6.02)
  silkscreen extent -16.48,-6.05 -0.02,6.05
C [mm] "Capacitor, SM Tantalum; Body 6.0 x 3.2 mm (LxW typ)"
  rect 2.6x2.2 smd: 1(-2.5,0) 2(2.5,0)
  silkscreen extent -3.93,-1.75 3.15,1.87
CAP8X8 [mil]
  round 60 hole 30: 1(0,140) 2(0,2.2)
  silkscreen extent -157,-86 157,229
CAPC1005L [mm] "Chip Capacitor, Body 1.0x0.5mm, IPC High Density"
  rect 0.6x0.5 smd: 1(-0.5,0) 2(0.5,0)
  silkscreen extent -1.1,-0.15 -1.1,0.15, body extent -0.55,-0.3 0.55,0.3, height 0.6
CAPC1608L [mm] "Chip Capacitor, Body 1.6x0.8mm, IPC High Density"
  rect 0.8x0.9 smd: 1(-0.7,0) 2(0.7,0)
  silkscreen extent -1.4,-0.35 -1.4,0.35, body extent -0.87,-0.48 0.87,0.48, height 0.85
CAPC3216L [mm] "Chip Capacitor, Body 3.2x1.6mm, IPC High Density"
  rect 1.1x1.7 smd: 1(-1.35,0) 2(1.35,0)
  silkscreen extent -0.4,-0.75 0.4,0.75, body extent -1.7,-0.9 1.7,0.9, height 1.35
CAPC3225N [mm] "Chip Capacitor, Body 3.2x2.5mm, IPC Medium Density"
  rect 1.3x2.7 smd: 1(-1.45,0) 2(1.45,0)
  silkscreen extent -0.4,-1.25 0.4,1.25, body extent -1.7,-1.35 1.7,1.35, height 1.35
CD1608-0603 [mm] "Chip Diode; Body 1.6 x 0.8 mm (LxW typ)"
  rect 1.1x1 smd: 1(-0.85,0) 2(0.85,0)
  silkscreen extent 1.7,-0.4 1.7,0.4
CD3216-1206 [mm] "Chip Diode; Body 3.2 x 1.6 mm (LxW typ)"
  rect 1.6x1.8 smd: 1(-1.4,0) 2(1.4,0)
  silkscreen extent -0.3,-0.8 0.3,0.8
EXBV8V [mm] "Chip Resistor Array, (0603x4); SM; 8 Leads; Body 3.40 x 1.80 mm (LxW max)"
  rect 0.45x0.7 smd: 1(-1.2,-0.75) 2(-0.4,-0.75) 3(0.4,-0.75) 4(1.2,-0.75) 5(1.2,0.75) 6(0.4,0.75) 7(-0.4,0.75) 8(-1.2,0.75)
  silkscreen extent -1.75,-0.9 1.7,0.9
FTG256_L [mil] "BGA, 256-Leads, Body 17x17mm, Pitch 1mm"
  round 14 smd mask+1.97: A1(-295.28,295.28) A2(-255.91,295.28) A3(-216.54,295.28) A4(-177.17,295.28) A5(-137.8,295.28) A6(-98.43,295.28) A7(-59.06,295.28) A8(-19.68,295.28) A9(19.68,295.28) A10(59.06,295.28) A11(98.43,295.28) A12(137.8,295.28) A13(177.17,295.28) A14(216.54,295.28) A15(255.91,295.28) A16(295.28,295.28) B1(-295.28,255.91) B2(-255.91,255.91) B3(-216.54,255.91) B4(-177.17,255.91) B5(-137.8,255.91) B6(-98.43,255.91) B7(-59.06,255.91) B8(-19.68,255.91) B9(19.68,255.91) B10(59.06,255.91) B11(98.43,255.91) B12(137.8,255.91) B13(177.17,255.91) B14(216.54,255.91) B15(255.91,255.91) B16(295.28,255.91) C1(-295.28,216.54) C2(-255.91,216.54) C3(-216.54,216.54) C4(-177.17,216.54) C5(-137.8,216.54) C6(-98.43,216.54) C7(-59.06,216.54) C8(-19.68,216.54) C9(19.68,216.54) C10(59.06,216.54) C11(98.43,216.54) C12(137.8,216.54) C13(177.17,216.54) C14(216.54,216.54) C15(255.91,216.54) C16(295.28,216.54) D1(-295.28,177.17) D2(-255.91,177.17) D3(-216.54,177.17) D4(-177.17,177.17) D5(-137.8,177.17) D6(-98.43,177.17) D7(-59.06,177.17) D8(-19.68,177.17) D9(19.68,177.17) D10(59.06,177.17) D11(98.43,177.17) D12(137.8,177.17) D13(177.17,177.17) D14(216.54,177.17) D15(255.91,177.17) D16(295.28,177.17) E1(-295.28,137.8) E2(-255.91,137.8) E3(-216.54,137.8) E4(-177.17,137.8) E5(-137.8,137.8) E6(-98.43,137.8) E7(-59.06,137.8) E8(-19.68,137.8) E9(19.68,137.8) E10(59.06,137.8) E11(98.43,137.8) E12(137.8,137.8) E13(177.17,137.8) E14(216.54,137.8) E15(255.91,137.8) E16(295.28,137.8) F1(-295.28,98.43) F2(-255.91,98.43) F3(-216.54,98.43) F4(-177.17,98.43) F5(-137.8,98.43) F6(-98.43,98.43) F7(-59.06,98.43) F8(-19.68,98.43) F9(19.68,98.43) F10(59.06,98.43) F11(98.43,98.43) F12(137.8,98.43) F13(177.17,98.43) F14(216.54,98.43) F15(255.91,98.43) F16(295.28,98.43) G1(-295.28,59.06) G2(-255.91,59.06) G3(-216.54,59.06) G4(-177.17,59.06) G5(-137.8,59.06) G6(-98.43,59.06) G7(-59.06,59.06) G8(-19.68,59.06) G9(19.68,59.06) G10(59.06,59.06) G11(98.43,59.06) G12(137.8,59.06) G13(177.17,59.06) G14(216.54,59.06) G15(255.91,59.06) G16(295.28,59.06) H1(-295.28,19.68) H2(-255.91,19.68) H3(-216.54,19.68) H4(-177.17,19.68) H5(-137.8,19.68) H6(-98.43,19.68) H7(-59.06,19.68) H8(-19.68,19.68) H9(19.68,19.68) H10(59.06,19.68) H11(98.43,19.68) H12(137.8,19.68) H13(177.17,19.68) H14(216.54,19.68) H15(255.91,19.68) H16(295.28,19.68) J1(-295.28,-19.68) J2(-255.91,-19.68) J3(-216.54,-19.68) J4(-177.17,-19.68) J5(-137.8,-19.68) J6(-98.43,-19.68) J7(-59.06,-19.68) J8(-19.68,-19.68) J9(19.68,-19.68) J10(59.06,-19.68) J11(98.43,-19.68) J12(137.8,-19.68) J13(177.17,-19.68) J14(216.54,-19.68) J15(255.91,-19.68) J16(295.28,-19.68) K1(-295.28,-59.06) K2(-255.91,-59.06) K3(-216.54,-59.06) K4(-177.17,-59.06) K5(-137.8,-59.06) K6(-98.43,-59.06) K7(-59.06,-59.06) K8(-19.68,-59.06) K9(19.68,-59.06) K10(59.06,-59.06) K11(98.43,-59.06) K12(137.8,-59.06) K13(177.17,-59.06) K14(216.54,-59.06) K15(255.91,-59.06) K16(295.28,-59.06) L1(-295.28,-98.43) L2(-255.91,-98.43) L3(-216.54,-98.43) L4(-177.17,-98.43) L5(-137.8,-98.43) L6(-98.43,-98.43) L7(-59.06,-98.43) L8(-19.68,-98.43) L9(19.68,-98.43) L10(59.06,-98.43) L11(98.43,-98.43) L12(137.8,-98.43) L13(177.17,-98.43) L14(216.54,-98.43) L15(255.91,-98.43) L16(295.28,-98.43) M1(-295.28,-137.8) M2(-255.91,-137.8) M3(-216.54,-137.8) M4(-177.17,-137.8) M5(-137.8,-137.8) M6(-98.43,-137.8) M7(-59.06,-137.8) M8(-19.68,-137.8) M9(19.68,-137.8) M10(59.06,-137.8) M11(98.43,-137.8) M12(137.8,-137.8) M13(177.17,-137.8) M14(216.54,-137.8) M15(255.91,-137.8) M16(295.28,-137.8) N1(-295.28,-177.17) N2(-255.91,-177.17) N3(-216.54,-177.17) N4(-177.17,-177.17) N5(-137.8,-177.17) N6(-98.43,-177.17) N7(-59.06,-177.17) N8(-19.68,-177.17) N9(19.68,-177.17) N10(59.06,-177.17) N11(98.43,-177.17) N12(137.8,-177.17) N13(177.17,-177.17) N14(216.54,-177.17) N15(255.91,-177.17) N16(295.28,-177.17) P1(-295.28,-216.54) P2(-255.91,-216.54) P3(-216.54,-216.54) P4(-177.17,-216.54) P5(-137.8,-216.54) P6(-98.43,-216.54) P7(-59.06,-216.54) P8(-19.68,-216.54) P9(19.68,-216.54) P10(59.06,-216.54) P11(98.43,-216.54) P12(137.8,-216.54) P13(177.17,-216.54) P14(216.54,-216.54) P15(255.91,-216.54) P16(295.28,-216.54) R1(-295.28,-255.91) R2(-255.91,-255.91) R3(-216.54,-255.91) R4(-177.17,-255.91) R5(-137.8,-255.91) R6(-98.43,-255.91) R7(-59.06,-255.91) R8(-19.68,-255.91) R9(19.68,-255.91) R10(59.06,-255.91) R11(98.43,-255.91) R12(137.8,-255.91) R13(177.17,-255.91) R14(216.54,-255.91) R15(255.91,-255.91) R16(295.28,-255.91) T1(-295.28,-295.28) T2(-255.91,-295.28) T3(-216.54,-295.28) T4(-177.17,-295.28) T5(-137.8,-295.28) T6(-98.43,-295.28) T7(-59.06,-295.28) T8(-19.68,-295.28) T9(19.68,-295.28) T10(59.06,-295.28) T11(98.43,-295.28) T12(137.8,-295.28) T13(177.17,-295.28) T14(216.54,-295.28) T15(255.91,-295.28) T16(295.28,-295.28)
  silkscreen extent -365,-335 335,335, body extent -335,-335 335,335, height 61
HDR1X2 [mm] "Connector; Header; 2 Position"
  rect 1.5x1.5 hole 0.9: 1(0,0)
  round 1.5 hole 0.9: 2(2.54,0)
  silkscreen extent -1.27,-1.27 3.81,1.27
HDR1X6 [mm] "Connector; Header; 6 Position"
  rect 1.5x1.5 hole 0.9: 1(0,0)
  round 1.5 hole 0.9: 2(2.54,0) 3(5.08,0) 4(7.62,0) 5(10.16,0) 6(12.7,0)
  silkscreen extent -1.27,-1.27 13.97,1.27
IDE40 [mm] "Connector; Header; 20x2 Position"
  rect 1.5x1.5 hole 0.9: 1(24.13,1.321)
  round 1.5 hole 0.9: 2(24.13,-1.219) 3(21.59,1.321) 4(21.59,-1.219) 5(19.05,1.321) 6(19.05,-1.219) 7(16.51,1.321) 8(16.51,-1.219) 9(13.97,1.321) 10(13.97,-1.219) 11(11.43,1.321) 12(11.43,-1.219) 13(8.89,1.321) 14(8.89,-1.219) 15(6.35,1.321) 16(6.35,-1.219) 17(3.81,1.321) 18(3.81,-1.219) 19(1.27,1.321) 20(1.27,-1.219) 21(-1.27,1.321) 22(-1.27,-1.219) 23(-3.81,1.321) 24(-3.81,-1.219) 25(-6.35,1.321) 26(-6.35,-1.219) 27(-8.89,1.321) 28(-8.89,-1.219) 29(-11.43,1.321) 30(-11.43,-1.219) 31(-13.97,1.321) 32(-13.97,-1.219) 33(-16.51,1.321) 34(-16.51,-1.219) 35(-19.05,1.321) 36(-19.05,-1.219) 37(-21.59,1.321) 38(-21.59,-1.219) 39(-24.13,1.321) 40(-24.13,-1.219)
  silkscreen extent -29.4,-4.32 29.4,5.59, body extent -29.5,-4.42 29.5,5.71
INDC3216L [mm] "Chip Inductor, Body 3.2x1.6mm, IPC High Density"
  rect 1x1.8 smd: 1(-1.5,0) 2(1.5,0)
  silkscreen extent -0.6,-0.8 0.6,0.8, body extent -1.75,-0.95 1.75,0.95, height 1.9
MASK_LT [mm]
  round 1 smd: 0(0,0)
  Top Layer pour cut-out: -1.016,1.016 1.016,1.016 1.016,-1.016 -1.016,-1.016
MASKTEST [mil]
  round 10 smd paste+0 mask+3: 0(0,0)
  Top Layer circle w8: c0,0 r15
MHOLE2 [mm]
  round 7 hole 3.2 unplated: 0(0,0)
PQFN5X5-32_V_M [mm]
  rect 0.3x0.35 smd paste-0.15: 1(-1.75,-2.325) 8(1.75,-2.325) 17(1.75,2.325) 24(-1.75,2.325)
  rect 0.3x0.55 smd paste-0.15: 2(-1.25,-2.225) 3(-0.75,-2.225) 4(-0.25,-2.225) 5(0.25,-2.225) 6(0.75,-2.225) 7(1.25,-2.225) 18(1.25,2.225) 19(0.75,2.225) 20(0.25,2.225) 21(-0.25,2.225) 22(-0.75,2.225) 23(-1.25,2.225)
  rect 0.35x0.3 smd paste-0.15: 9(2.325,-1.75) 16(2.325,1.75) 25(-2.325,1.75) 32(-2.325,-1.75)
  rect 0.55x0.3 smd paste-0.15: 10(2.225,-1.25) 11(2.225,-0.75) 12(2.225,-0.25) 13(2.225,0.25) 14(2.225,0.75) 15(2.225,1.25) 26(-2.225,1.25) 27(-2.225,0.75) 28(-2.225,0.25) 29(-2.225,-0.25) 30(-2.225,-0.75) 31(-2.225,-1.25)
  rect 3.4x3.4 smd paste-0.1 mask-0.1: 33(0,0)
  Top Layer region: 1.6,-2.15 1.6,-1.95 1.7,-1.95 1.9,-2.15
  Top Layer region: 1.6,2.15 1.6,1.95 1.7,1.95 1.9,2.15
  Top Layer region: -1.6,2.15 -1.6,1.95 -1.7,1.95 -1.9,2.15
  Top Layer region: -1.6,-2.15 -1.6,-1.95 -1.7,-1.95 -1.9,-2.15
  Top Layer region: 2.15,-1.6 1.95,-1.6 1.95,-1.7 2.15,-1.9
  Top Layer region: 2.15,1.6 1.95,1.6 1.95,1.7 2.15,1.9
  Top Layer region: -2.15,1.6 -1.95,1.6 -1.95,1.7 -2.15,1.9
  Top Layer region: -2.15,-1.6 -1.95,-1.6 -1.95,-1.7 -2.15,-1.9
  Top Layer lines w0.3: -0.25,-2.225 -0.25,-1.375 ; 0.25,1.35 0.25,2.225
  silkscreen extent -2.7,-3.47 2.7,2.7, body extent -2.55,-2.55 2.55,2.55, height 1
PWR_10PIN [mm]
  round 2.8 hole 1.6: 1(-8.402,2.1) 2(-4.202,2.1) 3(-0.002,2.1) 4(4.198,2.1) 5(8.398,2.1) 6(-8.402,-2.1) 7(-4.202,-2.1) 8(-0.002,-2.1) 9(4.198,-2.1) 10(8.398,-2.1)
  silkscreen extent -11.1,-6.17 11.1,4.8, body extent -11.1,-4.8 11.1,4.8, height 13
RESC1005L [mm] "Chip Resistor, Body 1.1x0.5mm, IPC High Density"
  rect 0.6x0.6 smd: 1(-0.5,0) 2(0.5,0)
  body extent -0.55,-0.3 0.55,0.3, height 0.4
RESC3216N [mm] "Chip Resistor, Body 3.2x1.6mm, IPC Medium Density"
  rect 1.3x1.8 smd: 1(-1.45,0) 2(1.45,0)
  silkscreen extent -0.4,-0.8 0.4,0.8, body extent -1.68,-0.87 1.68,0.87, height 0.71
SKQMA [mm]
  rect 1.8x1.6 smd: 1(-2.7,0) 2(2.7,0)
  silkscreen extent -3.2,-1.8 3.2,1.8
SMX2 [mm]
  rect 2.2x1.4 smd: 1(-1.925,-1.175) 2(1.875,-1.175) 3(1.875,1.225) 4(-1.925,1.225)
  silkscreen extent -2.99,-2.51 2.47,1.68
SOT23_L [mm] "SOT23, 3-Leads, Body 2.9x1.3mm, Pitch 0.95mm, Lead Span 2.3mm, IPC High Density"
  rect 1x0.6 smd: 1(-1,0.95) 2(-1,-0.95) 3(1,0)
  silkscreen extent -1.12,-1.5 0.7,1.92, body extent -0.7,-1.5 0.7,1.5, height 1.1
SOT-89_M [mm] "SOT89, 3-Leads, Body 4.6x2.6 mm, Pitch 1.5mm, Lead Span 4.1mm, IPC Low Density"
  rect 1.6x0.6 smd: 1(-1.9,1.5) 3(-1.9,-1.5)
  rect 2x0.7 smd: 2(-1.7,0)
  oct 3.4x2 smd: 2(1,0)
  silkscreen extent -2.07,-2.3 1.3,2.47, body extent -1.3,-2.3 1.3,2.3, height 1.7
TO-92_M [mm]
  oval 2x1 hole 0.8: 1(0,-1.905) 2(0,0) 3(0,1.905)
  silkscreen extent -2.6,-2.6 1.6,2.6
TP [mil]
  round 30 smd paste+0 mask+4: 1(0,0)
  silkscreen extent -20,-20 20,20
TQFP48_L [mm] "48-Pin Thin Quad Flat Pack 0.5 mm Pitch, IPC High Density"
  oval 1.55x0.25 smd: 1(-4.025,2.75) 2(-4.025,2.25) 3(-4.025,1.75) 4(-4.025,1.25) 5(-4.025,0.75) 6(-4.025,0.25) 7(-4.025,-0.25) 8(-4.025,-0.75) 9(-4.025,-1.25) 10(-4.025,-1.75) 11(-4.025,-2.25) 12(-4.025,-2.75) 25(4.025,-2.75) 26(4.025,-2.25) 27(4.025,-1.75) 28(4.025,-1.25) 29(4.025,-0.75) 30(4.025,-0.25) 31(4.025,0.25) 32(4.025,0.75) 33(4.025,1.25) 34(4.025,1.75) 35(4.025,2.25) 36(4.025,2.75)
  oval 0.25x1.55 smd: 13(-2.75,-4.025) 14(-2.25,-4.025) 15(-1.75,-4.025) 16(-1.25,-4.025) 17(-0.75,-4.025) 18(-0.25,-4.025) 19(0.25,-4.025) 20(0.75,-4.025) 21(1.25,-4.025) 22(1.75,-4.025) 23(2.25,-4.025) 24(2.75,-4.025) 37(2.75,4.025) 38(2.25,4.025) 39(1.75,4.025) 40(1.25,4.025) 41(0.75,4.025) 42(0.25,4.025) 43(-0.25,4.025) 44(-0.75,4.025) 45(-1.25,4.025) 46(-1.75,4.025) 47(-2.25,4.025) 48(-2.75,4.025)
  silkscreen extent -4.15,-2.85 2.85,3.55, body extent -3.5,-3.5 3.5,3.5, height 1.6
TS3B_M [mm] "D2-PAK, 4-Leads, Body 8.6x10.2mm, Pitch 2.54mm, Lead Span 14.2mm, IPC Low Density"
  rect 3.6x1.1 smd: 1(-6.1,2.54) 2(-6.1,0) 3(-6.1,-2.54)
  rect 8.7x10.55 smd: 4(3.55,0)
  silkscreen extent -6.23,-5.2 -1.2,5.2, body extent -2.55,-5.2 6.34,5.2, height 4.64
WSOP8 [mm]
  oval 0.6x2.2 smd: 1(-1.905,-3.4) 2(-0.635,-3.4) 3(0.635,-3.4) 4(1.905,-3.4) 5(1.905,3.4) 6(0.635,3.4) 7(-0.635,3.4) 8(-1.905,3.4)
  rect 0.5x0.889 smd: 1(-1.905,-2.701) 2(-0.635,-2.701) 3(0.635,-2.701) 4(1.905,-2.701) 5(1.905,2.701) 6(0.635,2.701) 7(-0.635,2.701) 8(-1.905,2.701)
  Top Layer lines w0.254: 1.905,-2.625 1.905,-2.701 ; 0.635,-2.625 0.635,-2.701 ; -0.635,2.701 -0.635,2.625 ; -0.635,-2.625 -0.635,-2.701 ; -1.905,2.701 -1.905,2.625
  silkscreen extent -3.56,-4.01 2.75,1.9, body extent -2.75,-2.73 2.75,2.73, height 2.13

## Part data
C1 C2 C3 C4 C5 C6 C7 C8 C9 C10 C11 C12 C13 C15 C16 C17 C18 C19 C20 C21 C22 C23 C24 C25 C27 C28 C29 C30 C31 C32 C33 C34 C35 C36 C37 C38 C39 C40 C41 C42 C45 C46 C47 C48 C50 C51 C52 C53 C54 C55 C56 C57 C58 C59 C60 C61 C62 C63 C64 C65 C66 C67 C68 C69 C70: library part "Cap Semi", "Capacitor (Semiconductor SIM Model)"
C14 C26: library part T492C, "Solid Tantalum Chip Capacitor, T492 Series - CWR11 Style Per Mil-PRF-55365/8"
C43 C44 C49: library part "Cap Pol1", "Polarized Capacitor (Radial)"
D1 D2 D3: "High Conductance Fast Diode"
DATA_P1 DATA_P2 DATA_P3 DATA_P4: "Header, 20-Pin, Dual row"
DONE LED1 LED2 LED3 LED4: library part LED3, "Typical BLUE SiC LED"
F1 F2: "Fuse"
FAN1 FAN2 FAN3: "Header, 4-Pin"
FB1 FB2 FB3 FB4 R1 R2 R3 R4 R5 R6 R7 R8 R9 R10 R11 R12 R13 R14 R15 R16 R17 R18 R19 R20 R21 R22 R23 R24 R25 R26 R27 R28 R29 R30 R31 R32 R33 R34 R35 R36 R37 R38 R39 R40 R41 R42 R43 R44 R45 R46 R47 R48 R49 R50 R51 R52 R53 R54 R55 R56 R57 R58 R59 R60 R61 R62 R63 R64 R65 R66: library part Res3, "Resistor"
J1 J2: "Header, 2-Pin"
JTAG1 P1 P2: "Header, 6-Pin"
M1 M2 M3 M4: library part M_Hole
P3 P4: library part "Header 3", "Header, 3-Pin"
POWER_IN1: "Header, 5-Pin, Dual row"
PROG: "Switch"
Q1 Q2: "NPN Switching Transistor"
RN1 RN2 RN3: library part RES4PACK
U1: "Spartan-6 LX 1.2V FPGA, 186 User I/Os, 256-Ball Fine-Pitch Thin BGA (1.0mm Pitch), Speed Grade 2, Commercial Grade, Pb-Free"
U2: library part LM1086CS-2.5, "1.5A Low Dropout Positive Regulators, 3-pin TO-263"
U4: library part uPD720114
U5: "USB UART Asynchronous Serial Data Transfer Chip, QFN-32, Tray"
U6: library part W25Q64CV
USB-A1: "USB 1.1, Vertical, Thru-Hole, A Type, Receptacle, 4 Position, Black"
USB-B1: "USB 1.1, Right Angle, Thru-Hole, B Type, Receptacle, 4 Position, White"
Y1: "Surface Mount Quartz Crystal"
Y2: "Crystal Oscillator"

## Via types
v1: diameter 20, hole 12, Top Layer to Bottom Layer, tented both sides, 334 vias
v2: diameter 32, hole 18, Top Layer to Bottom Layer, tented both sides, 84 vias
v3: diameter 50, hole 28, Top Layer to Bottom Layer, 32 vias
v4: diameter 25.98, hole 12.99, Top Layer to Bottom Layer, tented both sides, 9 vias
v5: diameter 50, hole 28, Top Layer to Bottom Layer, tented both sides, 6 vias

## Nets (pads, with @x,y where several pads share a name; then routed paths per layer and width w, separated by ;. In a path a pad name is that pad's centre, name@x,y a point inside that pad or via, vN(x,y) a via of type N, cw(c..) or ccw(c..) an arc to the next point about the centre after c; other vN are vias at no path point)
5VSB: C15.2 C44.1 F1.1 J1.2 POWER_IN1.1 POWER_IN1.6 R17.2 R23.1 U2.3 | length 4303
  Top Layer w10: 1935,2905 R17.2@1990.31,2905 ; R17.2@1985.5,2900.18 ccw(c1973.87,2888.56) 1973.87,2905 ccw(c1973.87,2921.44) R17.2@1985.5,2909.82
  Top Layer w20: R23.1@2445,3164.68 2445,3210
  Top Layer w40: v2(2315,3210) v2(2360,3210) 2440,3210 2550,3210 2670,3330 v2(2970,3330)
  Top Layer w50: U2.3@1775.16,2560 1775.16,2875.16 1800,2900 1850,2900
  Top Layer w120: POWER_IN1.6@1724.31,3352.32 ccw(c1969.69,3352.32) 1796.18,3178.82 ; POWER_IN1.6@1725.52,3355.54 ccw(c1786.03,3302.63) 1729.2,3245.8 ; POWER_IN1.1@1729.2,3517.68 POWER_IN1.6@1729.2,3352.32 1729.2,3245.8 ; 1883.59,3091.41 cw(c1810.19,3018) 1914,3018 ; C44.1@1884,3018 1884,3091 ; 1914,3017.76 ccw(c1811.58,3018.57) 1884,3091 ; 1729.2,3245.8 1884,3091
  Bottom Layer w50: C44.1@1884,3018 2058,3018 2250,3210 v2(2315,3210) v2(2360,3210) ; v2(2935,3330) v2(2970,3330) 3120,3330 v2(3150,3300) ; 3137.08,3312.92 ccw(c3190,3365.84) v2@3190,3291 ; v2@3152.25,3308.72 cw(c3139.7,3260) 3190,3260 ; v2@3156.36,3306.36 cw(c3075.16,3225.16) 3190,3225.16 ; 3173.57,3294.68 ccw(c3186.91,3314.96) v2@3191.82,3291.19 ; 3180.83,3286.81 cw(c3202.08,3294.08) v2@3181.92,3303.96 ; v2@3193.6,3291.75 cw(c3177.85,3327.85) v2(3150,3300) ; J1.2@3850,2875 3670,3055 3310,3055 3190,3175 v2(3190,3300) v2(3150,3300)
  other v2: 1950,3018
CLK: R2.1 U1.K12 | length 913.2
  Top Layer w6: v1@2169.52,1990.74 cw(c2169.52,1973.84) 2181.47,1985.79 cw(c2193.42,1997.74) v1@2176.52,1997.74 ; v1(2169.52,1997.74) U1.K12@2189.2,1978.06 ; U1.K12@2185.2,1978.06 ccw(c2175.55,1978.06) 2182.38,1984.88 ccw(c2189.2,1991.71) U1.K12@2189.2,1982.06
  Top Layer w8: R2.1@1534.68,1775 v1(1570,1775) ; R2.1@1540.21,1769.48 cw(c1553.54,1756.14) 1553.54,1775 cw(c1553.54,1793.86) R2.1@1540.21,1780.52 ; v1@1565.76,1770.76 ccw(c1555.51,1760.51) 1555.51,1775 ccw(c1555.51,1789.49) v1@1565.76,1779.24
  Bottom Layer w6: 2055,2015.74 2122.69,2015.74 2151.52,2015.74 v1(2169.52,1997.74) ; v1@2162.52,1997.74 ccw(c2145.62,1997.74) 2157.57,2009.69 ccw(c2169.52,2021.64) v1@2169.52,2004.74
  Bottom Layer w8: v1(1570,1775) 1751,1775 1991.74,2015.74 2055,2015.74 ; v1@1574.24,1770.76 cw(c1584.49,1760.51) 1584.49,1775 cw(c1584.49,1789.49) v1@1574.24,1779.24
D1_N: U4.25 U5.15 | length 933.4
  Top Layer w8: U5.15@2476.6,2981.21 2492,2981.21 2494.21,2979 2556.37,2979 2569,2991.63 2569,3171.63 2694.37,3297 2944,3297 3006.43,3234.57 3006.43,3151.84 3008.27,3150 U4.25@3008.27,3113.46 ; U5.15@2482.87,2978.88 cw(c2488.5,2973.25) 2488.5,2981.21
  Top Layer w11.81: U5.15@2476.73,2980.67 2488.27,2980.67
D1_P: U4.26 U5.14 | length 926
  Top Layer w8: U5.14@2476.6,2961.53 2492,2961.53 2493.47,2963 2563,2963 2585,2985 2585,3165 2701,3281 2937.37,3281 2990.43,3227.95 2990.43,3195.84 cw(c2981.93,3195.84) 2981.93,3187.34 ccw(c2981.93,3178.84) 2981.93,3170.34 cw(c2981.93,3161.84) 2990.43,3161.84 2990.43,3151.84 2988.58,3150 U4.26@2988.58,3113.46 ; U5.14@2482.87,2959.2 cw(c2488.5,2953.57) 2488.5,2961.53
  Top Layer w11.81: U5.14@2476.73,2960.98 2488.27,2960.98
D2_N: U4.28 USB-A1.2 | length 410.7
  Top Layer w8: 2947.37,3150.6 cw(c2954.9,3150.6) v1@2953.84,3158.06 ; U4.28@2949.21,3113.46 2949.21,3150 2947.37,3151.84 2947.37,3158.37 v1(2953,3164)
  Bottom Layer w8: USB-A1.2@2899.37,3425.04 2868,3393.67 2868,3344.13 2947.5,3264.63 2947.5,3169.5 v1(2953,3164) ; 2947.5,3172.45 ccw(c2961.45,3172.45) v1@2951.59,3162.59 ; 2947.5,3191.76 ccw(c2980.76,3191.76) v1@2957.24,3168.24
D2_P: U4.29 USB-A1.3 | length 410.4
  Top Layer w8: v1@2925.07,3158.07 cw(c2923.92,3150.71) 2931.37,3150.71 ; v1(2926,3164) 2931.37,3158.63 2931.37,3151.84 2929.53,3150 U4.29@2929.53,3113.46
  Bottom Layer w8: USB-A1.3@2820.63,3425.04 2852,3393.67 2852,3337.5 2931.5,3258 2931.5,3169.5 v1(2926,3164) ; v1@2921.76,3168.24 ccw(c2898.24,3191.76) 2931.5,3191.76 ; v1@2927.41,3162.59 ccw(c2917.55,3172.45) 2931.5,3172.45
DONE1: DONE.1 R48.2 U1.P13 | length 717.7
  Top Layer w5: U1.P13@2149.83,2135.54 2164.7,2150.41 2164.7,2262 ; U1.P13@2149.83,2140.04 ccw(c2149.83,2150.9) 2157.52,2143.22 ccw(c2165.2,2135.54) U1.P13@2154.33,2135.54
  Top Layer w6: 2164.7,2262 2164.7,2309.7 v1(2188,2333) ; v1@2181,2333 cw(c2164.1,2333) 2176.05,2321.05 cw(c2188,2309.1) v1@2188,2326
  Top Layer w8: DONE.1@2129,2454.54 2141.46,2467 R48.2@2181.69,2467 ; DONE.1@2135.71,2451.62 cw(c2158.24,2442.8) 2158.24,2467 ; DONE.1@2143.16,2448.7 cw(c2169.96,2438.22) 2169.96,2467 ; DONE.1@2150.61,2445.79 cw(c2181.68,2433.63) R48.2@2181.68,2467 ; 2162.97,2467 ccw(c2162.97,2490.35) R48.2@2179.48,2473.84 ; 2169.32,2467 cw(c2169.32,2452.63) 2179.48,2462.79 cw(c2158.9,2442.21) v1@2188,2442.21 ; v1@2182.8,2443 ccw(c2168.56,2451.22) 2184.45,2455.48 ; v1@2183.76,2444.24 ccw(c2173.51,2454.49) 2188,2454.49 ccw(c2202.49,2454.49) v1@2192.24,2444.24 ; 2185.16,2452.8 ccw(c2197.26,2456.05) v1@2191,2445.2 ; v1(2188,2440) 2188,2473.31 R48.2@2181.69,2467 ; R48.2@2188,2456.7 cw(c2196.61,2456.7) R48.2@2190.52,2462.79
  Bottom Layer w8: v1@2183.76,2337.24 ccw(c2173.51,2347.49) 2188,2347.49 ccw(c2202.49,2347.49) v1@2192.24,2337.24 ; v1@2183.76,2435.76 cw(c2173.51,2425.51) 2188,2425.51 cw(c2202.49,2425.51) v1@2192.24,2435.76 ; v1(2188,2333) v1(2188,2440)
FAN_PWM: Q1.3 R28.2 R43.2 R58.2 | length 1258.4
  Top Layer w8: R58.2@494.48,2914.79 cw(c481.14,2901.46) 500,2901.46 cw(c518.86,2901.46) R58.2@505.52,2914.79 ; v1@495.76,2859.24 ccw(c485.51,2869.49) 500,2869.49 ccw(c514.49,2869.49) v1@504.24,2859.24 ; v1(500,2855) R58.2@500,2916.38 ; R43.2@782.48,2914.79 cw(c769.14,2901.46) 788,2901.46 cw(c806.86,2901.46) R43.2@793.52,2914.79 ; v1@783.76,2859.24 ccw(c773.51,2869.49) 788,2869.49 ccw(c802.49,2869.49) v1@792.24,2859.24 ; v1(788,2855) R43.2@788,2916.38 ; v1@855,2800 cw(c855,2785.51) 865.24,2795.76 cw(c875.49,2806) v1@861,2806 ; v1(855,2806) 866.63,2794.37 Q1.3@900,2794.37 ; Q1.3@894.48,2788.85 ccw(c881.14,2775.51) 881.14,2794.37 ccw(c881.14,2813.23) Q1.3@894.48,2799.89 ; v1(1070,2855) 1090,2875 R28.2@1090,2916.38 ; v1@1070,2861 ccw(c1070,2875.49) 1080.24,2865.24 ccw(c1090.49,2855) v1@1076,2855 ; R28.2@1084.48,2914.79 cw(c1071.14,2901.46) 1090,2901.46 cw(c1108.86,2901.46) R28.2@1095.52,2914.79
  Bottom Layer w8: v1(500,2855) v1(788,2855) ; v1@504.24,2850.76 cw(c514.49,2840.51) 514.49,2855 cw(c514.49,2869.49) v1@504.24,2859.24 ; v1@783.76,2859.24 cw(c773.51,2869.49) 773.51,2855 cw(c773.51,2840.51) 783.76,2850.76 cw(c773.51,2840.51) 788,2840.51 cw(c802.49,2840.51) 792.24,2850.76 cw(c802.49,2840.51) 802.49,2855 cw(c802.49,2869.49) v1@792.24,2859.24 ; v1@850.76,2801.76 ccw(c840.51,2791.51) 840.51,2806 ccw(c840.51,2820.49) v1@850.76,2810.24 ; v1(855,2806) 815,2806 788,2833 v1(788,2855) ; v1@1065.76,2850.76 ccw(c1055.51,2840.51) 1055.51,2855 ccw(c1055.51,2869.49) v1@1065.76,2859.24 ; v1(1070,2855) v1(788,2855)
FAN_SPEED1: R60.1 U1.N16 | length 2478.8
  Top Layer w6: 1941,2096.17 U1.N16@2031.72,2096.17 ; U1.N16@2028.9,2093.34 ccw(c2022.07,2086.51) 2022.07,2096.17 ccw(c2022.07,2105.82) U1.N16@2028.9,2098.99
  Top Layer w8: R60.1@544.48,2914.79 cw(c531.14,2901.46) 550,2901.46 cw(c568.86,2901.46) R60.1@555.52,2914.79 ; R60.1@550,2920.32 550,2880 581,2849 651,2849 744,2756 744,2495 841,2398 1012,2398 1130,2280 1130,1895 1181,1844 1688.83,1844 1941,2096.17
FAN_SPEED2: R44.1 U1.P16 | length 2381.2
  Top Layer w6: 1950.5,2127.5 1958.04,2135.04 1987.56,2135.04 1988.06,2135.54 U1.P16@2031.72,2135.54 ; U1.P16@2028.9,2132.71 ccw(c2022.07,2125.88) 2022.07,2135.54 ccw(c2022.07,2145.19) U1.P16@2028.9,2138.36
  Top Layer w8: R44.1@834.48,2914.79 cw(c821.14,2901.46) 840,2901.46 cw(c858.86,2901.46) R44.1@845.52,2914.79 ; R44.1@840,2920.32 840,2870.38 757,2787.38 757,2500.38 846.38,2411 1017.38,2411 1143,2285.38 1143,1900.38 1186.38,1857 1680,1857 1950.5,2127.5
FAN_SPEED3: R29.1 U1.P15 | length 2695.8
  Top Layer w5: 1983,2146.04 2012.04,2146.04 2016.04,2150.04 2056.59,2150.04 U1.P15@2071.09,2135.54 ; U1.P15@2066.59,2135.54 ccw(c2055.73,2135.54) 2063.41,2143.22 ccw(c2071.09,2150.9) U1.P15@2071.09,2140.04
  Top Layer w6: 1946.59,2146.04 1983,2146.04
  Top Layer w8: R29.1@1134.48,2914.79 cw(c1121.14,2901.46) 1140,2901.46 cw(c1158.86,2901.46) R29.1@1145.52,2914.79 ; R29.1@1140,2920.32 1140,2863 1106,2829 817,2829 770,2782 770,2505.77 851.77,2424 1022.77,2424 1156,2290.77 1156,1905.77 1191.77,1870 1670.56,1870 1946.59,2146.04
FANGND: C56.1 C58.1 C63.1 C66.1 FAN1.1 FAN2.1 FAN3.1 FB3.1 FB4.1 | length 3534.7
  Top Layer w32: C56.1@465,3033.83 502,3033.83 502,3079.91 cw(c455.73,3079.91) C56.1@486.24,3045.12 ; C63.1@760,3033.83 797,3033.83 797,3079.91 cw(c750.73,3079.91) C63.1@781.24,3045.12 ; C58.1@1050,3033.83 1087,3033.83 1087,3079.91 cw(c1040.73,3079.91) C58.1@1071.24,3045.12
  Top Layer w40: C56.1@428,3033.03 v2(428,3079.91) ; v2@428,3074.2 ccw(c473.73,3074.2) C56.1@441.39,3041.87 ; C56.1@502,3033.03 C56.1@502,3033.83 ; C63.1@723,3033.03 v2(723,3079.91) ; v2@723,3074.2 ccw(c768.73,3074.2) C63.1@736.39,3041.87 ; C63.1@783.61,3041.87 ccw(c751.27,3074.2) v2@797,3074.2 ; C63.1@797,3033.03 v2@797,3079.91 ; C58.1@1013,3033.03 v2(1013,3079.91) ; v2@1013,3074.2 ccw(c1058.73,3074.2) C58.1@1026.39,3041.87 ; C58.1@1073.61,3041.87 ccw(c1041.27,3074.2) v2@1087,3074.2 ; C58.1@1087,3033.03 v2@1087,3079.91
  Mid-Layer 1 w40: v2@503,3079 438,3144 438,3501.39 FAN1.1@511.81,3575.2 ; 704,3060.89 cw(c727.56,3060.89) v2@722.07,3083.8 ; 704,3079 704,3452.43 FAN2.1@826.77,3575.2 ; 704,3116.13 ccw(c759.21,3116.13) v2@720.17,3077.08 ; 992,3079 992,3425.46 FAN3.1@1141.73,3575.2 ; 992,3120.95 ccw(c1054.04,3120.95) v2@1010.17,3077.08
  Mid-Layer 1 w120: v2@503,3079 704,3079 992,3079 1347,3079 1347,2953
  other v2: 1307,2870 1347,2870 1387,2870 1287,2900 1327,2900 1367,2900 501,3079.91 796,3079.91 1086,3079.91
FPGA1_CS: R40.2 U1.T3 U6.1 | length 2587.6
  Top Layer w6: v1@2524.05,2290.05 cw(c2512.1,2278.1) 2529,2278.1 cw(c2545.9,2278.1) v1@2533.95,2290.05 ; v1(2529,2295) 2529,2259 2543.54,2244.46 U1.T3@2543.54,2214.28 ; U1.T3@2540.71,2217.1 ccw(c2533.88,2223.93) 2543.54,2223.93 ccw(c2553.19,2223.93) U1.T3@2546.36,2217.1
  Top Layer w8: U6.1@935.21,2278.07 ccw(c952.27,2295.13) U6.1@952.27,2271 ; U6.1@938.68,2276.03 cw(c933.46,2267.13) U6.1@942.99,2263.18 ; U6.1@939.06,2264.96 cw(c949.27,2259.93) U6.1@950.83,2271.2 ; U6.1@939.47,2265.53 cw(c952.68,2252.32) U6.1@952.68,2271 ; U6.1@940.87,2283.72 ccw(c971.59,2314.44) 971.59,2271 ; U6.1@941,2283.86 953.86,2271 ; U6.1@941.2,2276.05 cw(c941.65,2258.8) 953.86,2271 ; U6.1@945.13,2259.87 cw(c971.99,2233.01) 971.99,2271 ; U6.1@946.52,2289.38 ccw(c990.9,2333.76) 990.9,2271 ; U6.1@946.6,2271.39 cw(c942.02,2263.58) U6.1@950.38,2260.11 ; U6.1@946.84,2264 cw(c953.86,2263.98) 953.86,2271 ; U6.1@948.81,2283.65 ccw(c966.06,2283.2) 953.86,2271 ; 1003.42,2271 cw(c1003.42,2232.73) R40.2@1030.48,2259.79 ; 1022.73,2271 cw(c1022.73,2252.05) R40.2@1036.13,2265.45 ; R40.2@1035.87,2265.45 cw(c1049.27,2252.05) 1049.27,2271 ; R40.2@1041.52,2259.79 cw(c1068.58,2232.73) 1068.58,2271 ; v1@1084.76,2266.76 ccw(c1074.51,2256.51) 1074.51,2271 ccw(c1074.51,2285.49) v1@1084.76,2275.24 ; v1(1089,2271) 953.86,2271
  Bottom Layer w6: v1@1089,2264 cw(c1089,2247.1) 1100.95,2259.05 cw(c1112.9,2271) v1@1096,2271 ; v1(1089,2271) 1128,2232 1128,1945 1157,1916 1717.66,1916 1932.66,2131 1985.44,2131 2068.44,2214 2190,2214 2271,2295 v1(2529,2295) ; v1@2524.05,2290.05 ccw(c2512.1,2278.1) 2512.1,2295 ccw(c2512.1,2311.9) v1@2524.05,2299.95